# Altium PCB IM_v1.1.PcbDoc (part 1 of 4)
Units mm, origin at the board's own origin, x right, y up, seen from the top; angles counter-clockwise.
Board outline 120 x 85 mm, 4 copper layers (Top Layer, S2, S3, Bottom Layer), stack 1.516 mm thick; 285 components, 245 nets, 1048 pads, 482 vias.
Unrouted connection lines stored in the file: 53.
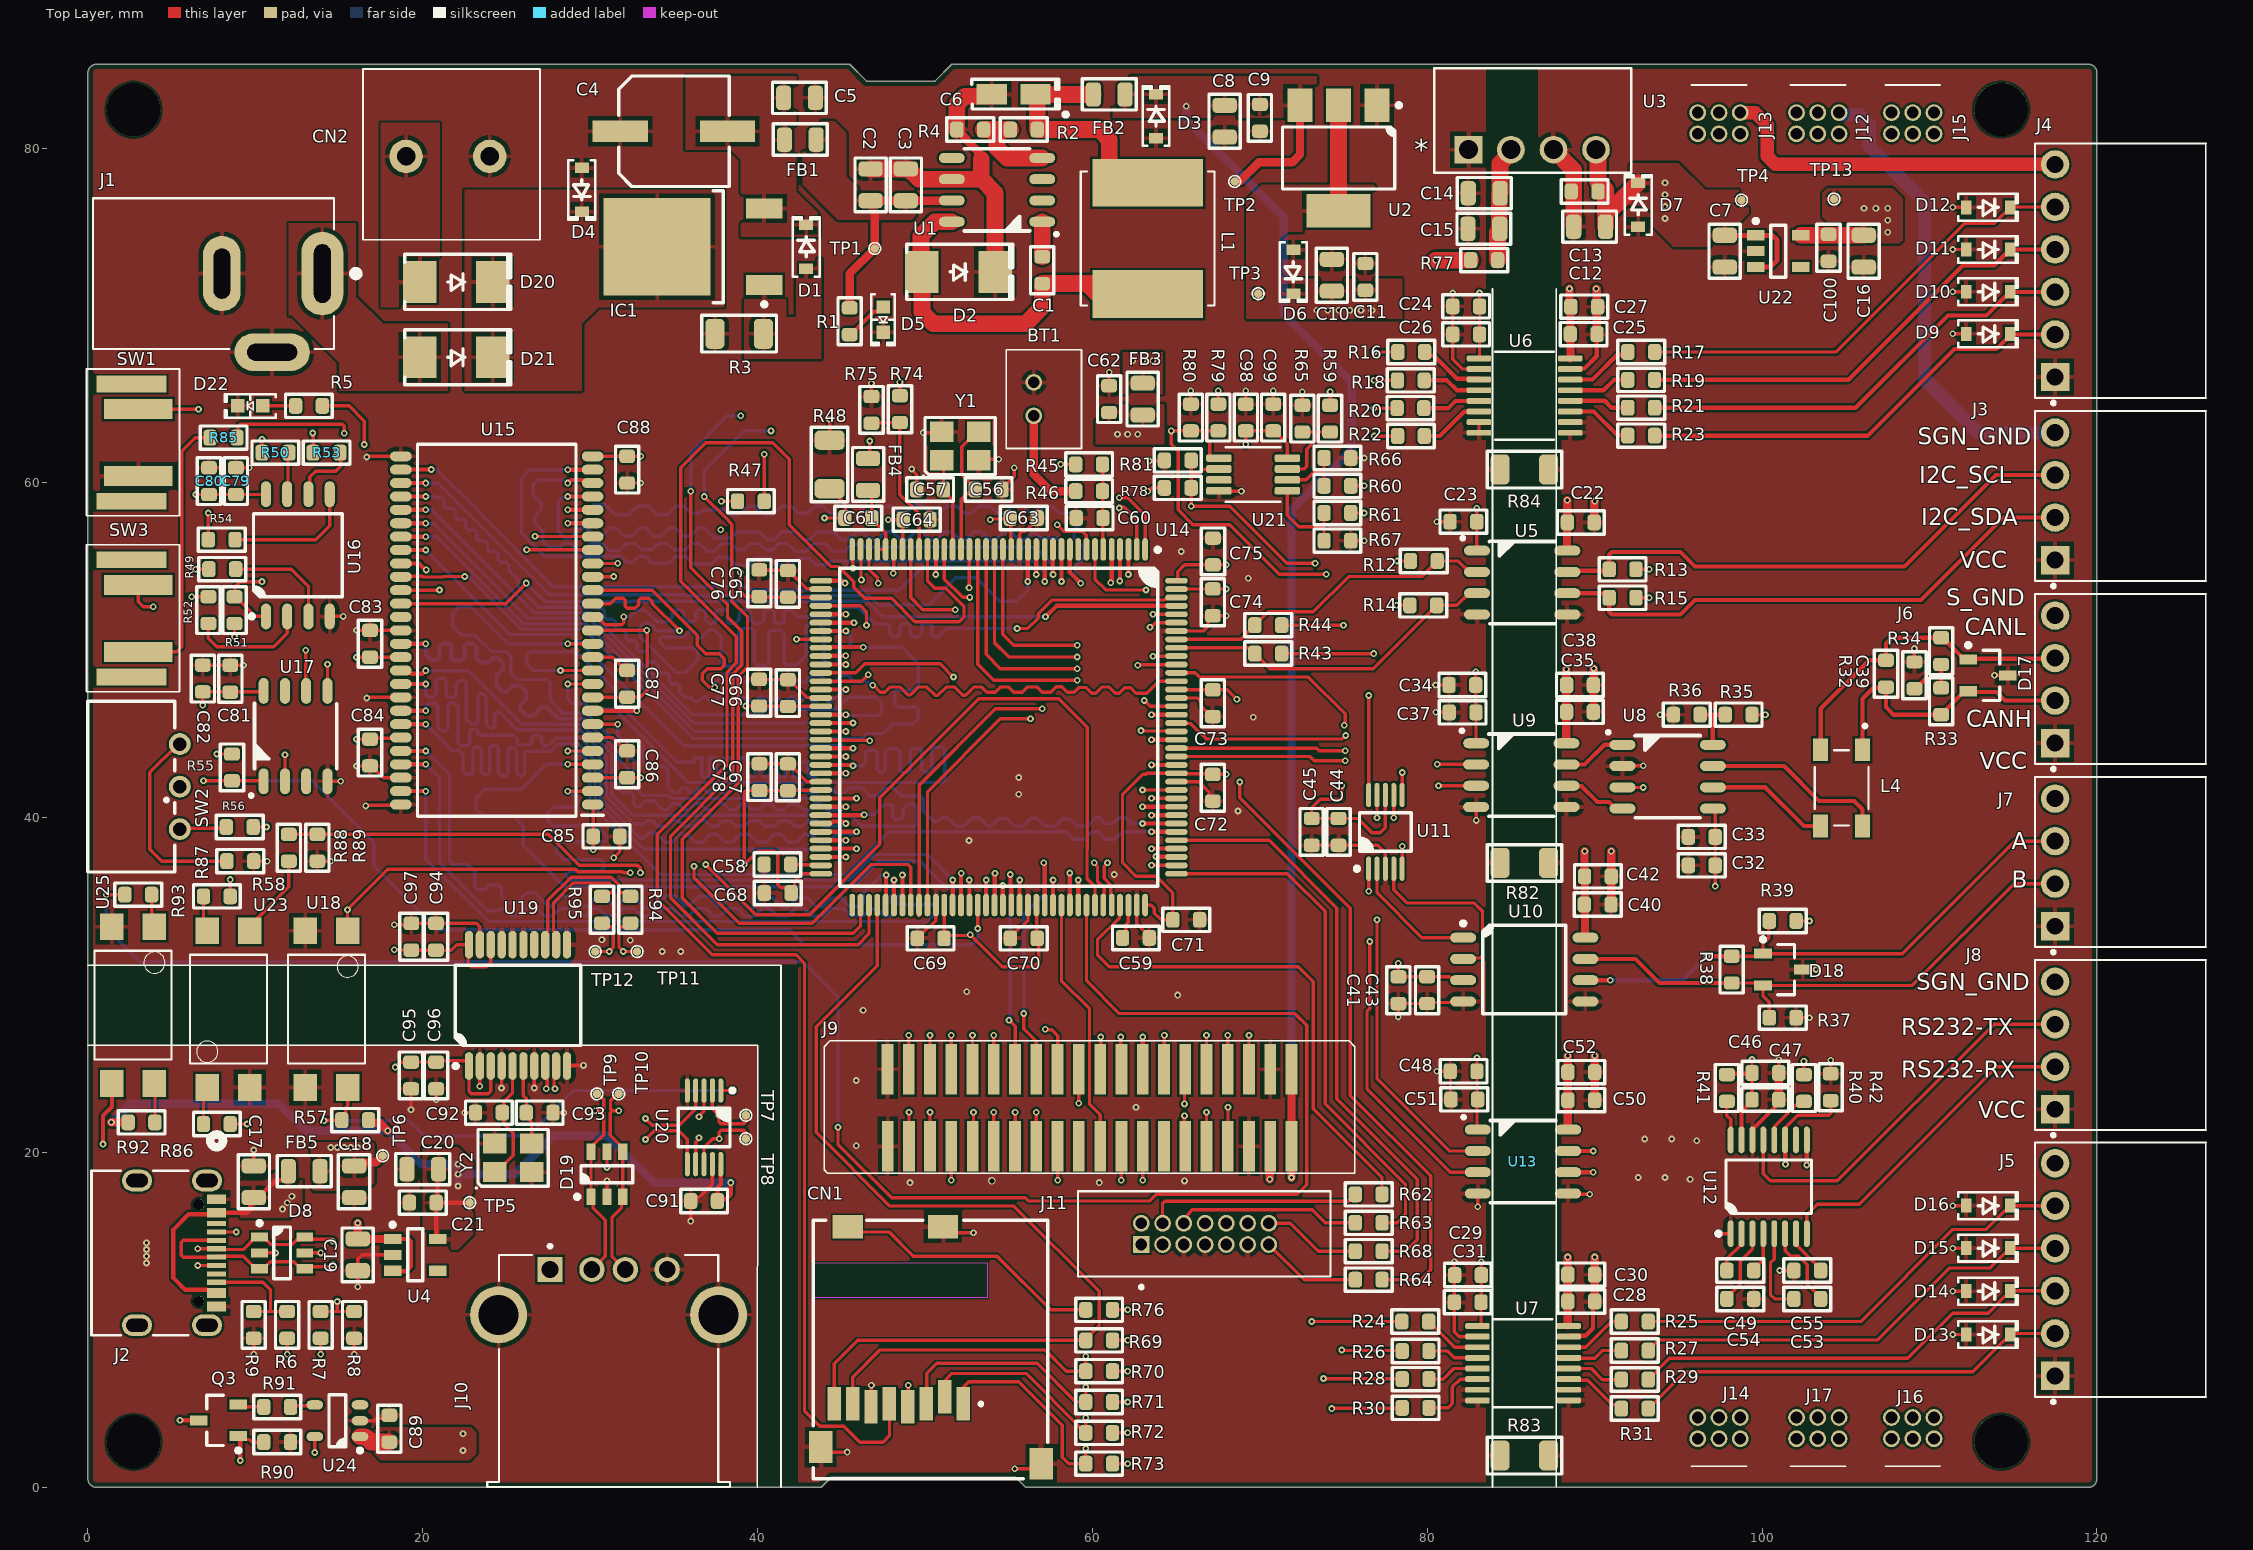
[diagram p0: Top Layer view]
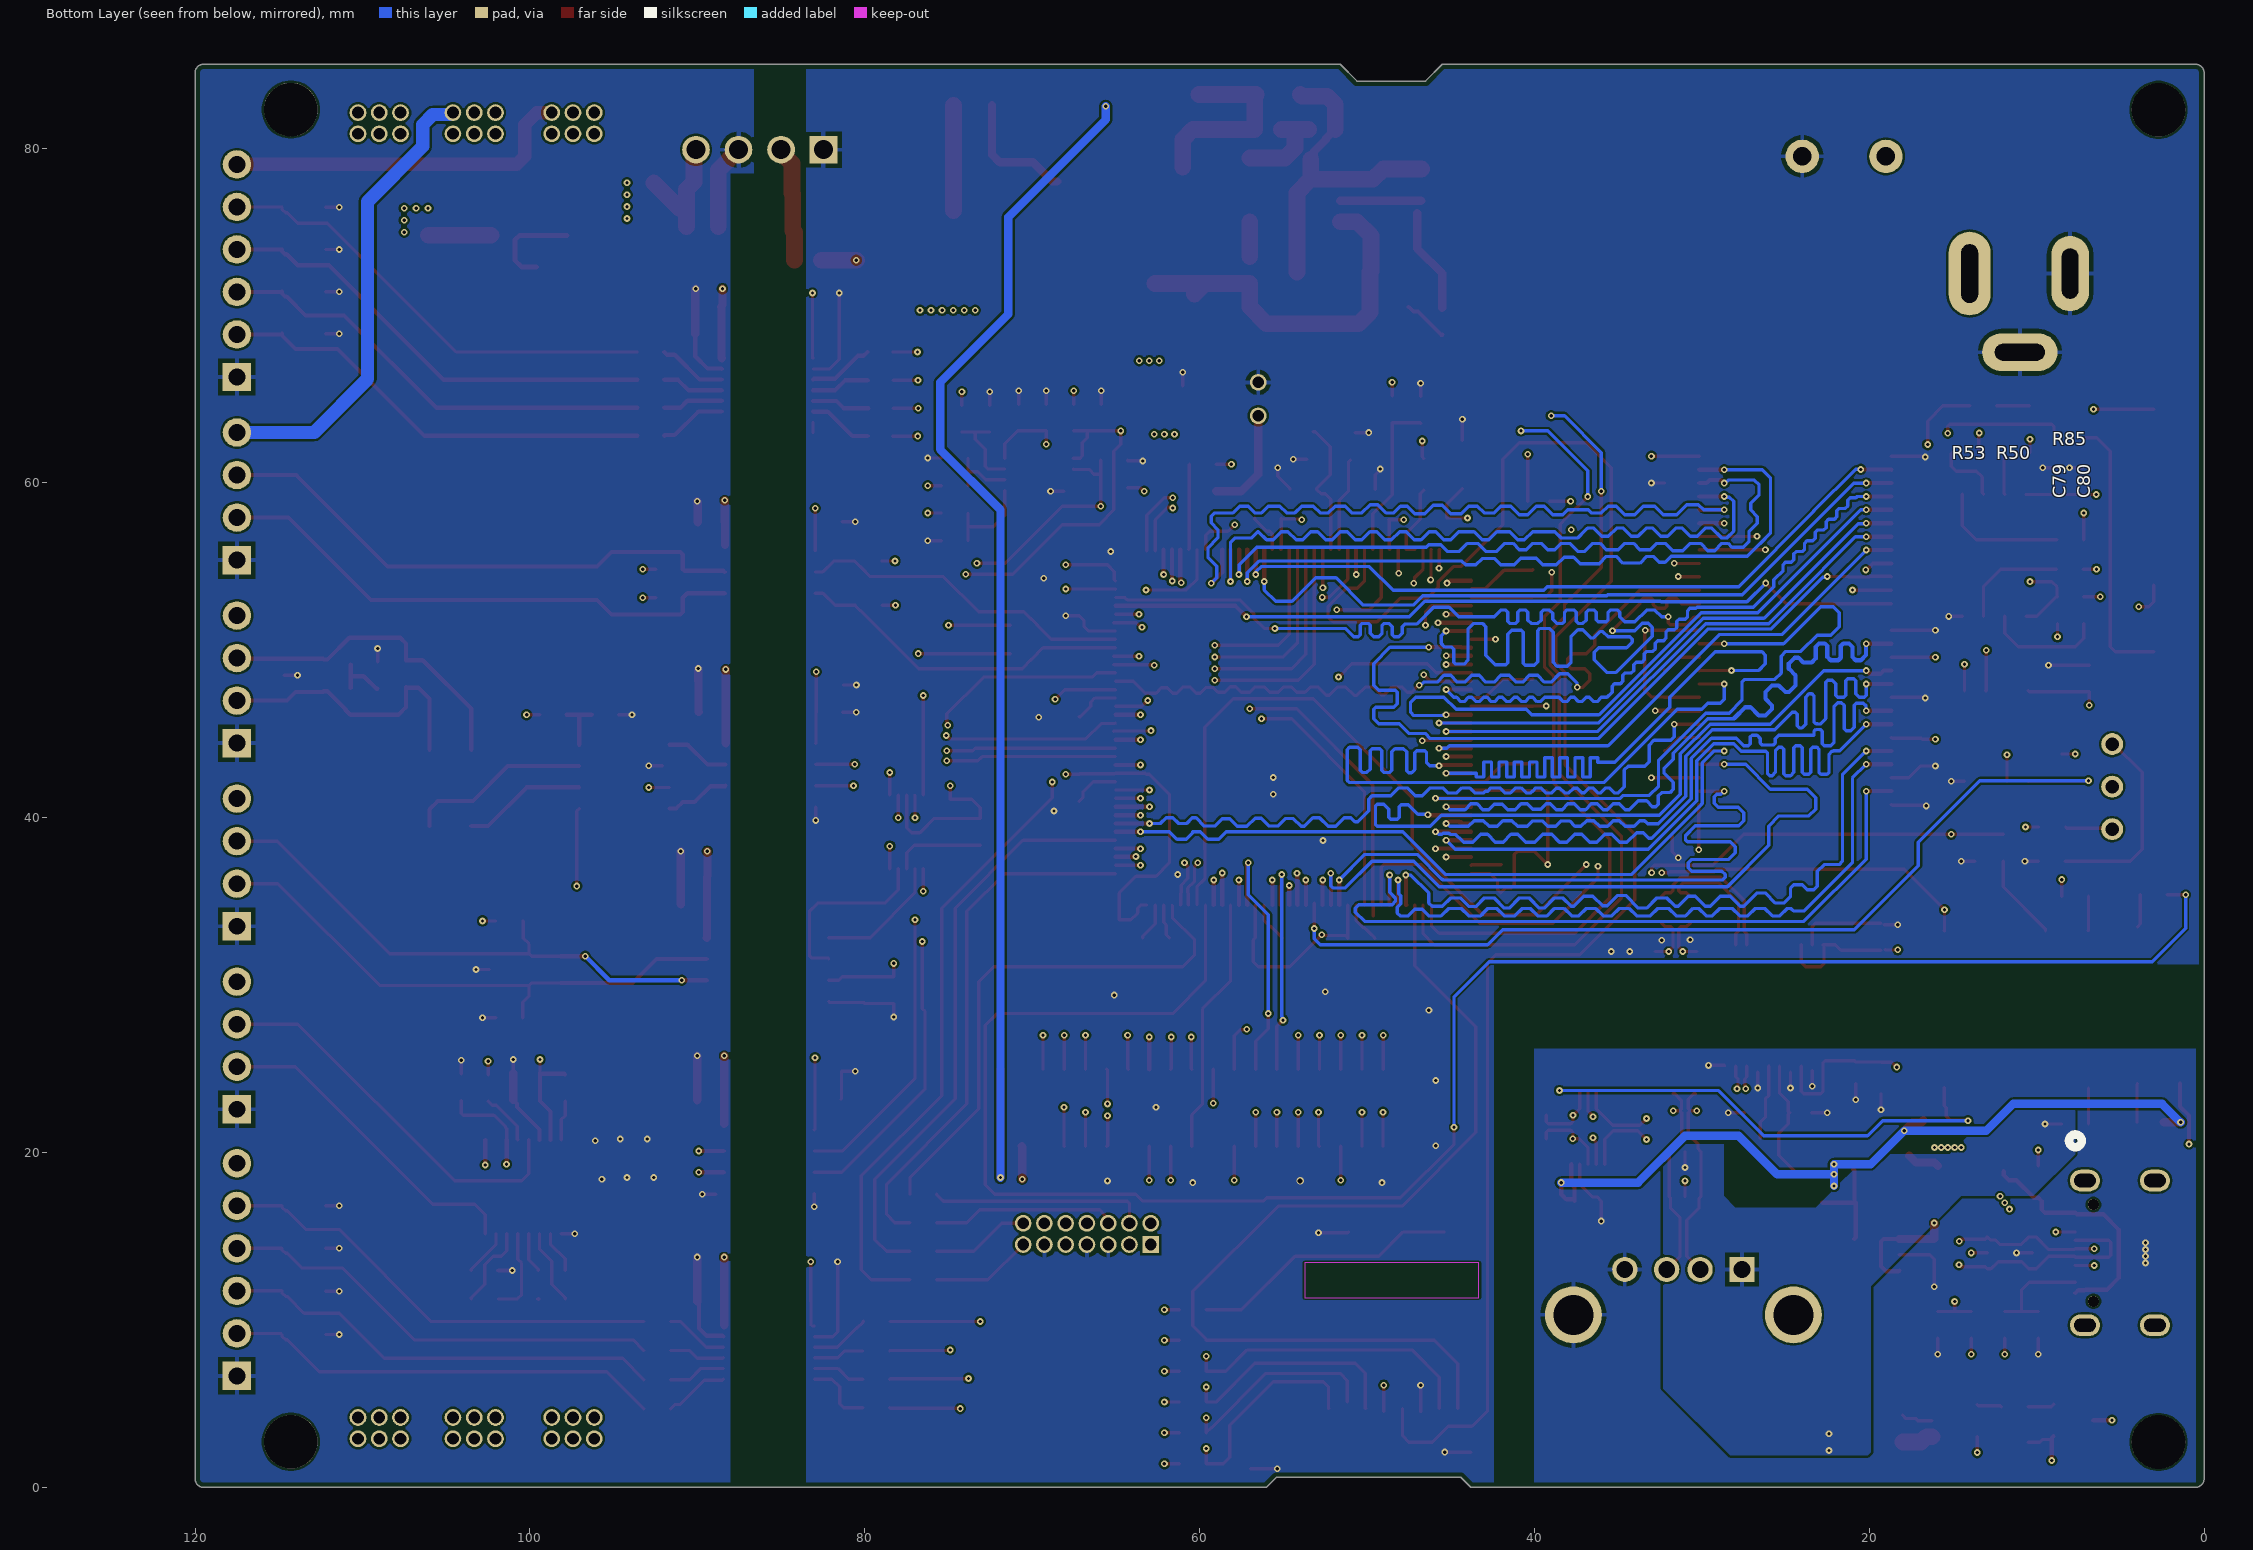
[diagram p1: Bottom Layer view, seen from below]
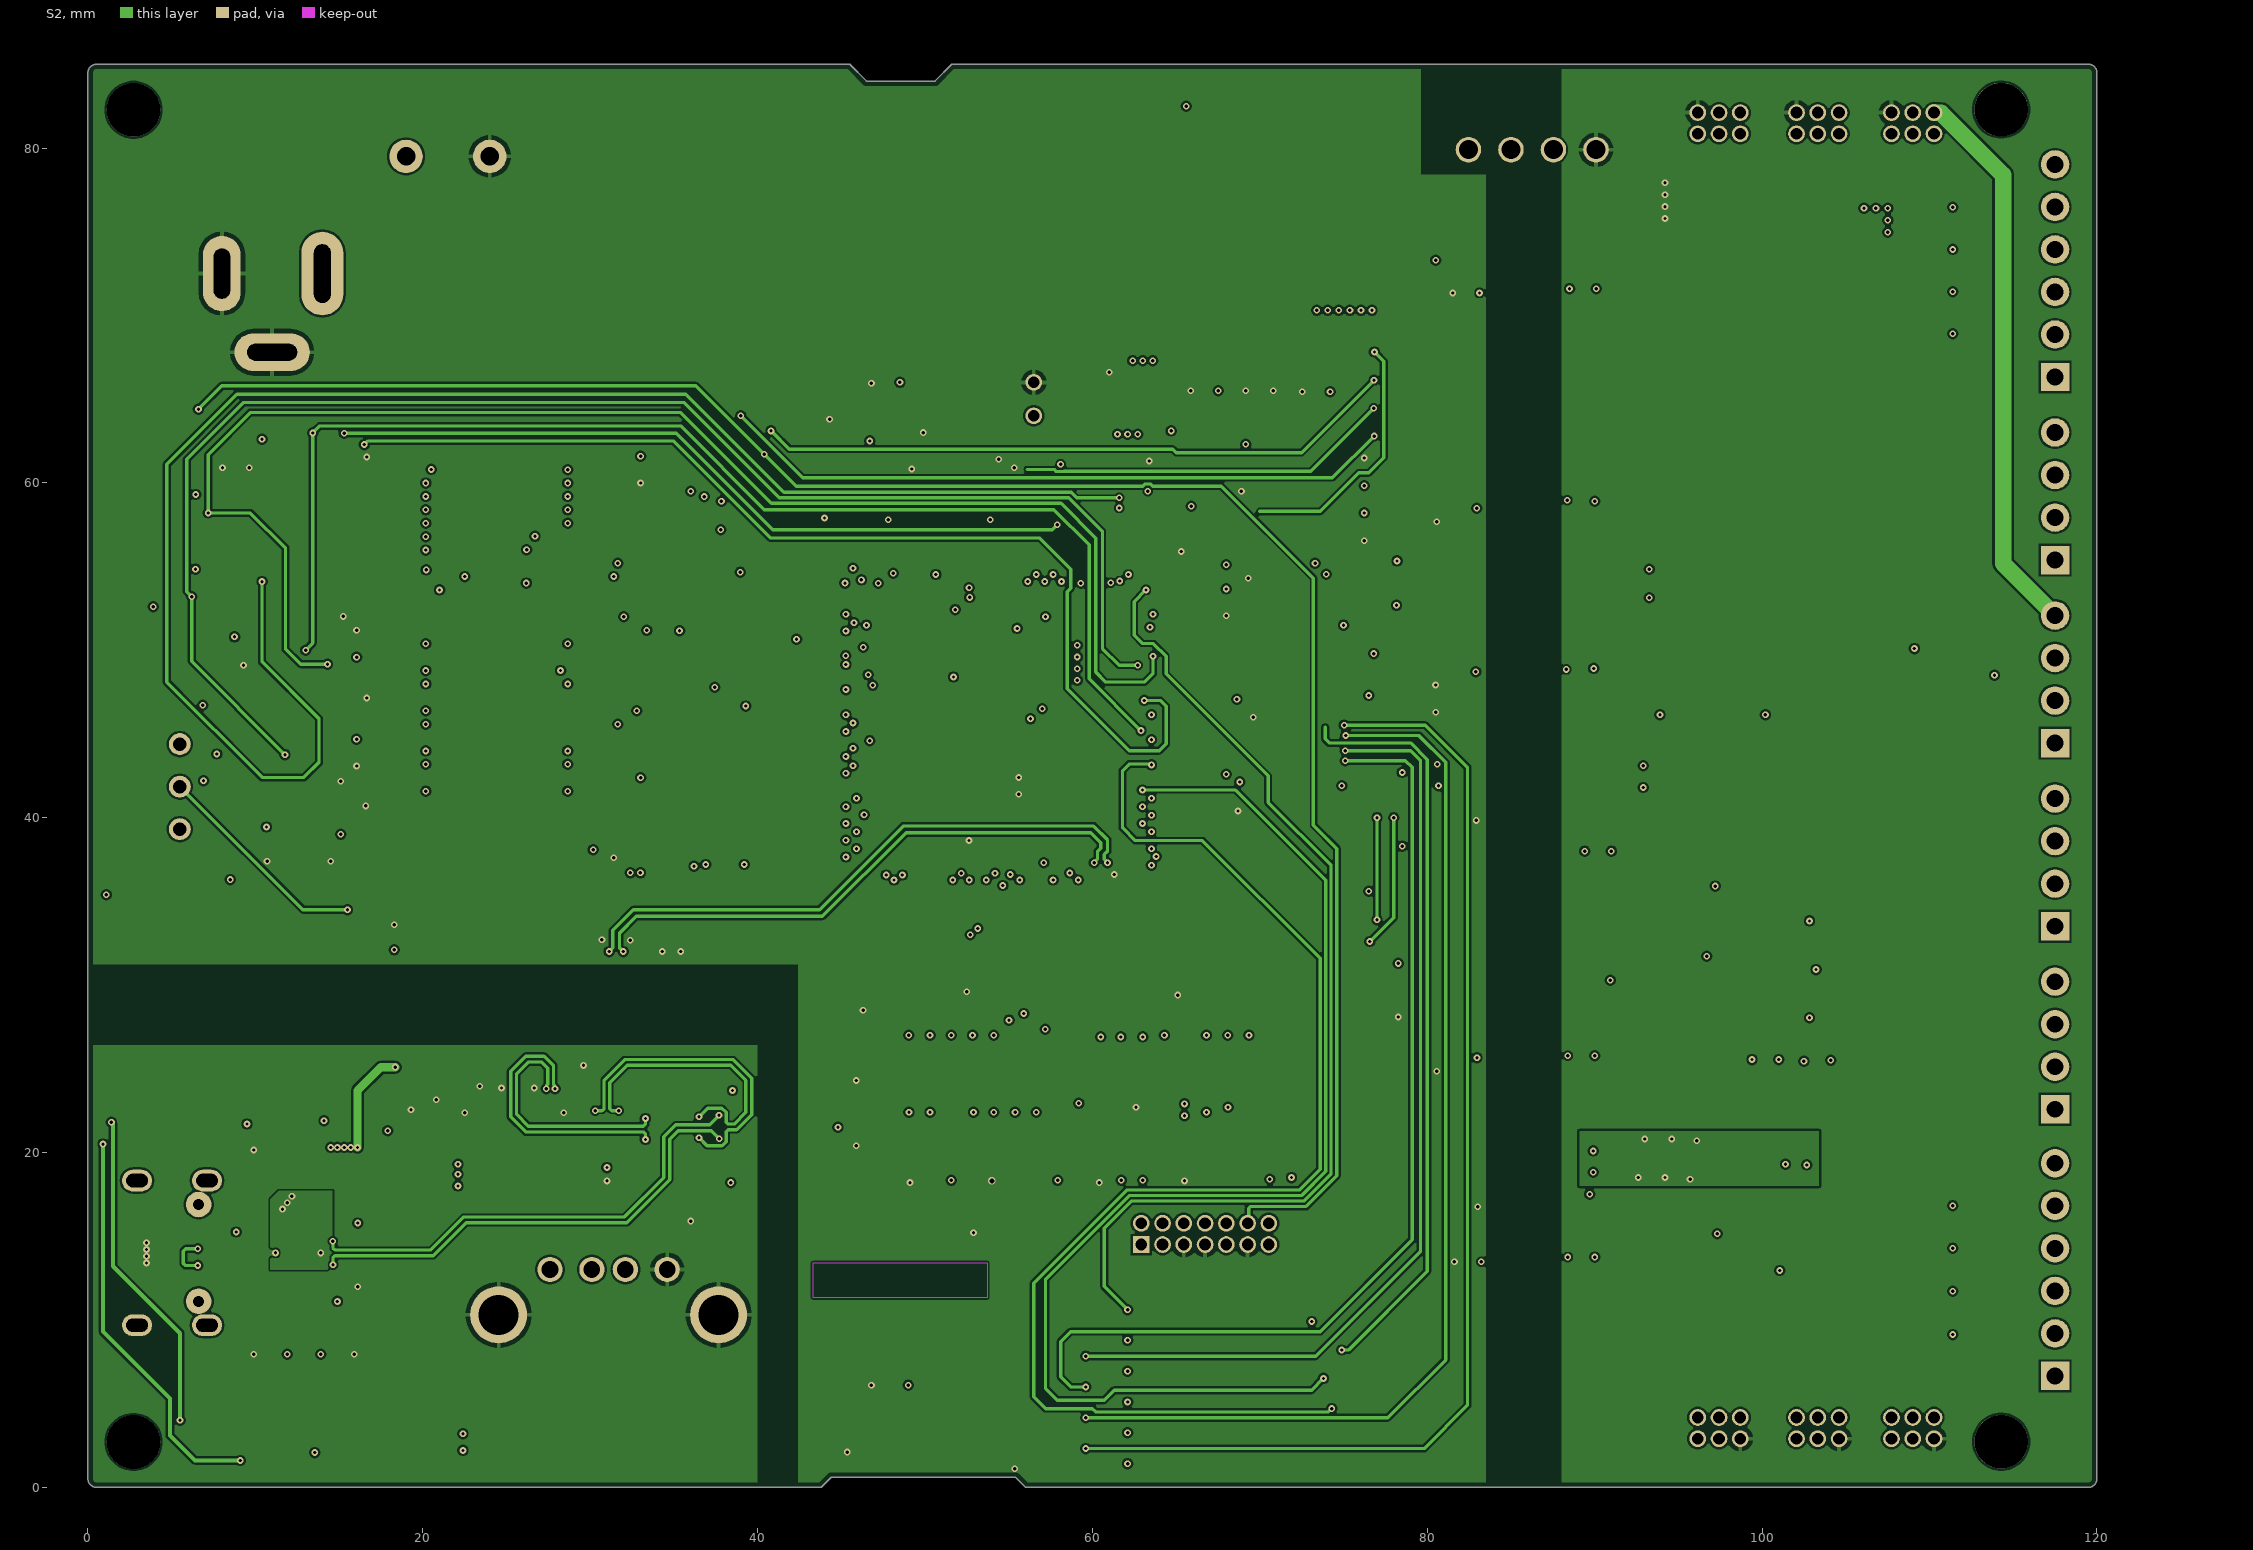
[diagram p2: S2]
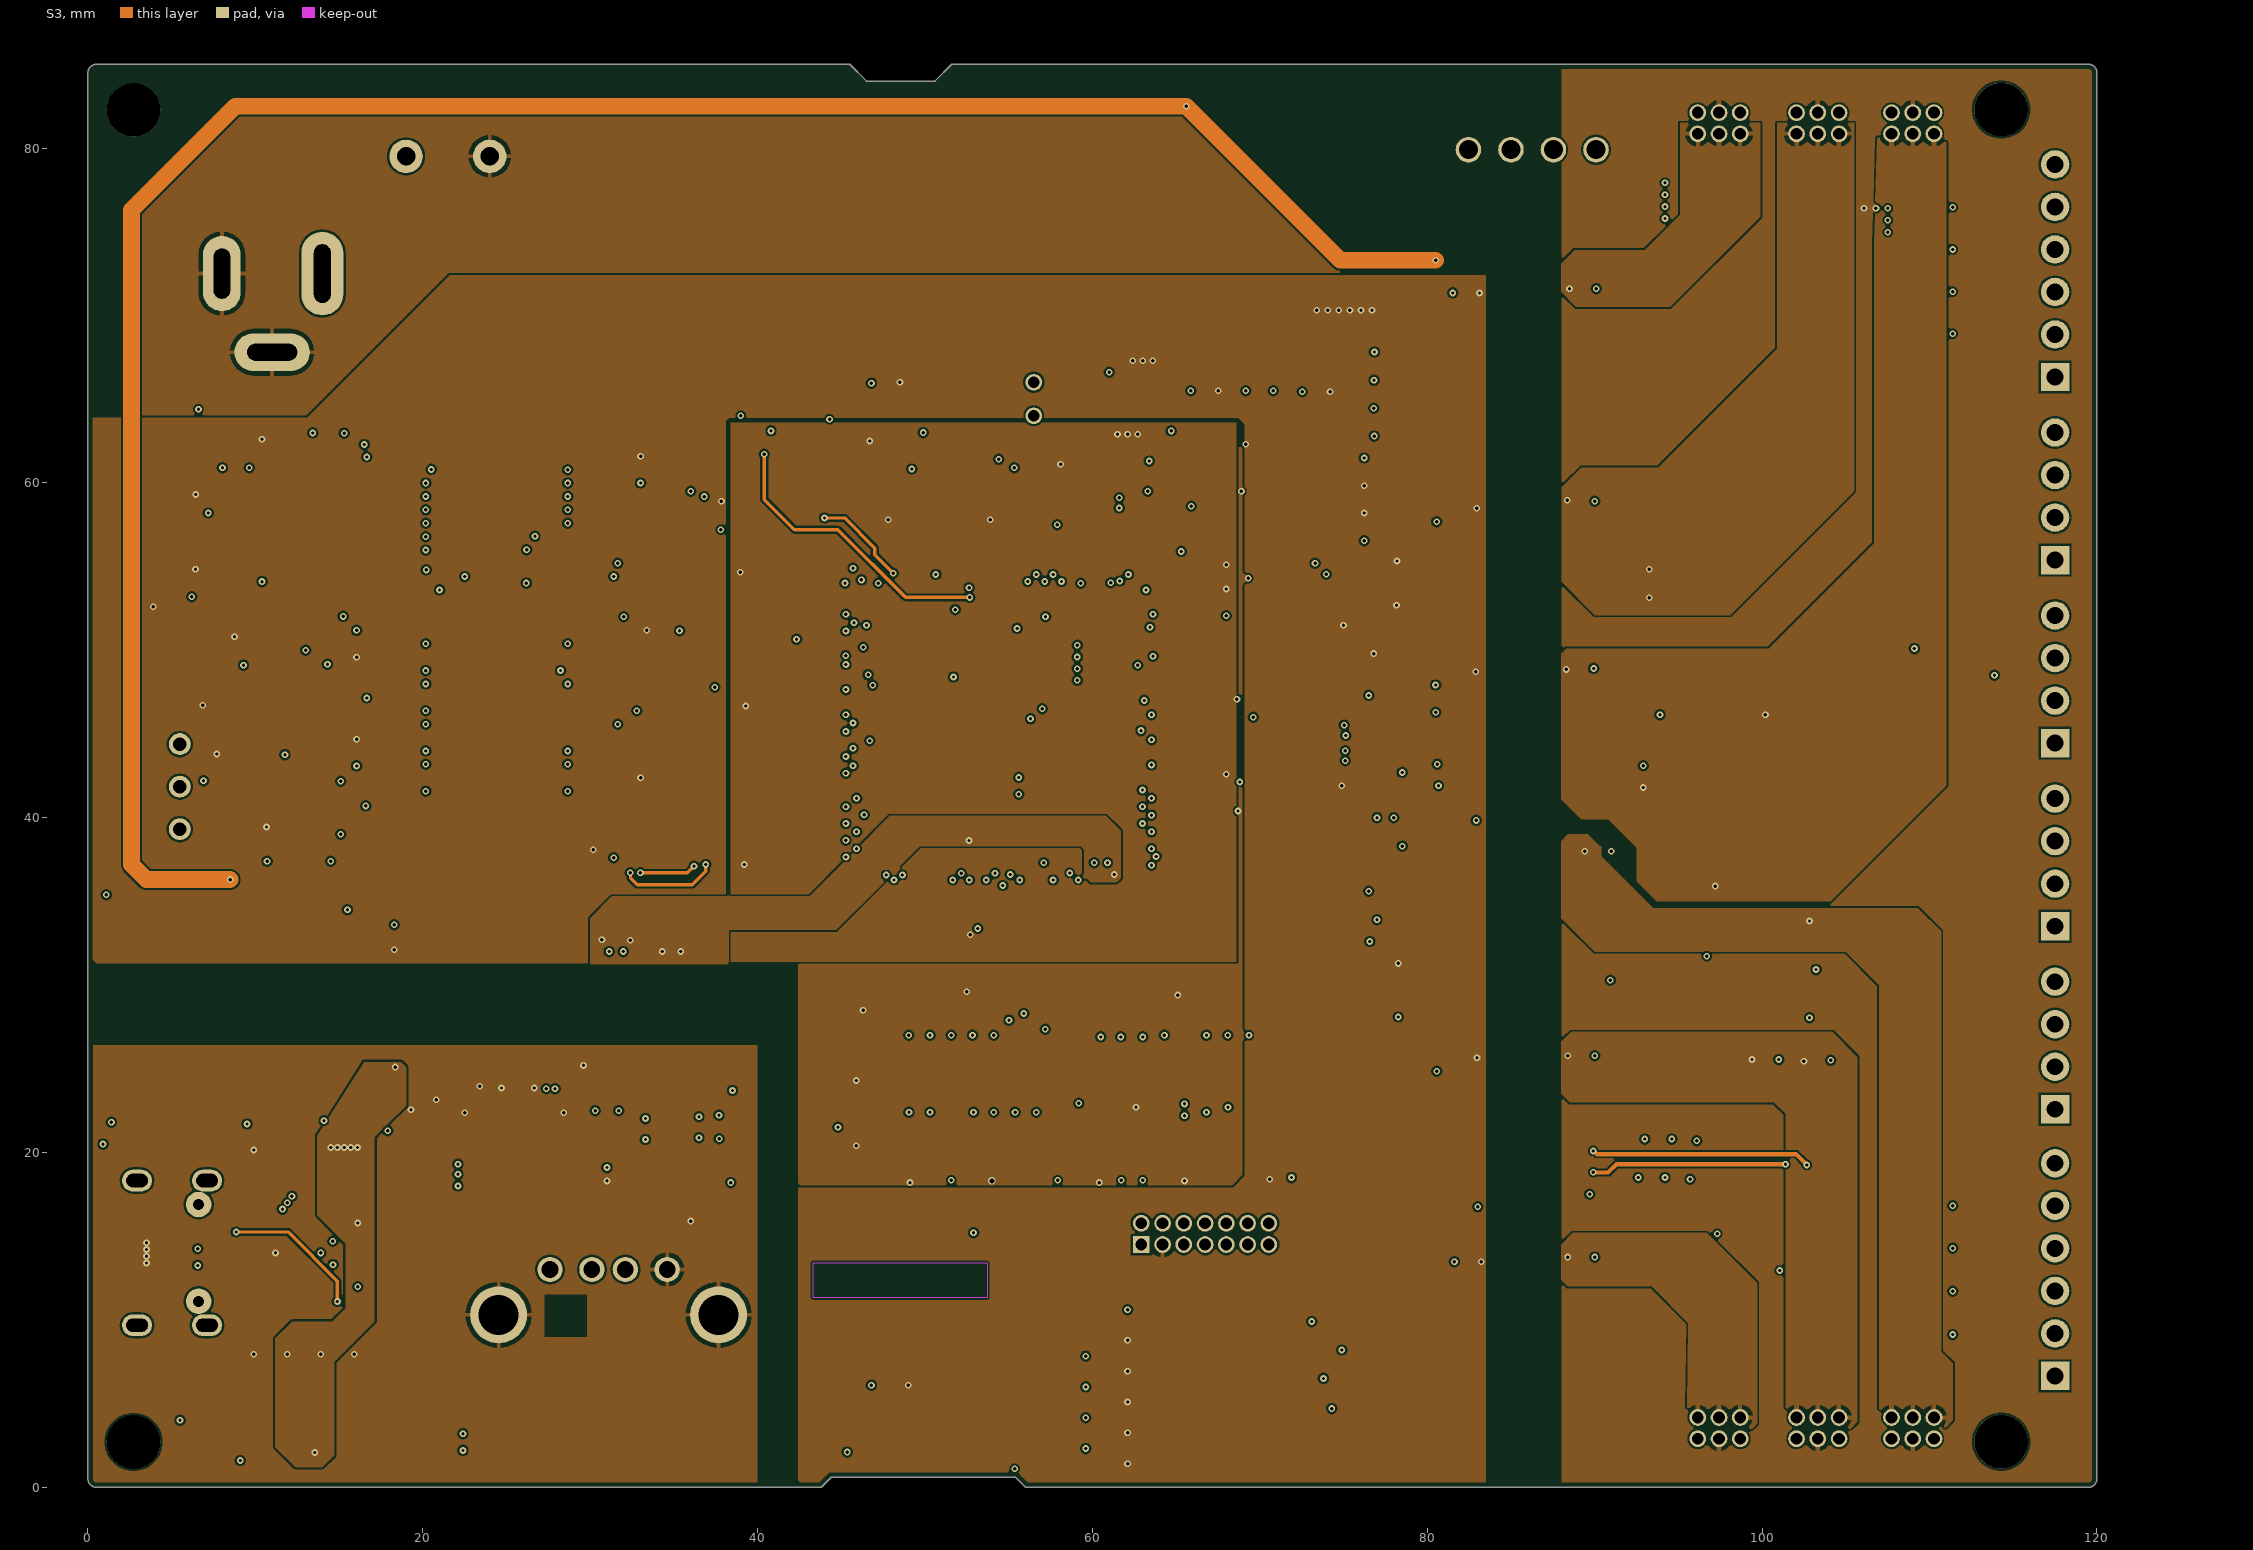
[diagram p3: S3]
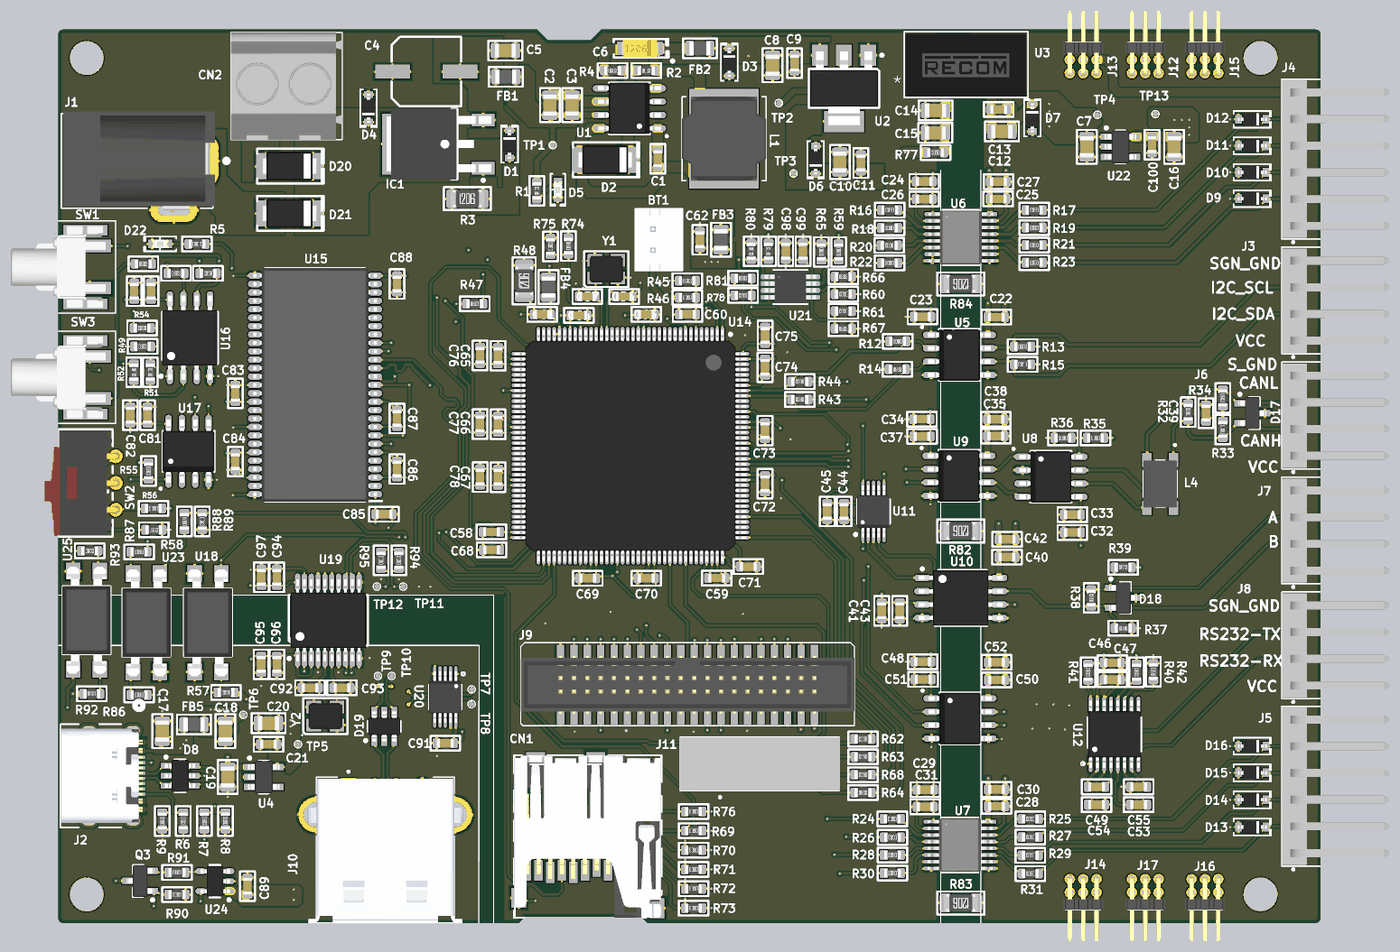
[diagram p6: 3D render of the assembled board from above, using the file's embedded part models]

## Layer stack, top to bottom
Top Solder: solder mask 0.0102, Solder Resist, Dk 3.5
Top Layer: signal copper 0.035
Dielectric 2: prepreg 0.0994, PP-006, Dk 4.1
Dielectric 4: prepreg 0.55, PP-006, Dk 4.1
S2: signal copper 0.0152
Dielectric 1: dielectric 0.1164, FR-4, Dk 4.8
S3: signal copper 0.0152
Dielectric 5: prepreg 0.55, PP-006, Dk 4.1
Dielectric 3: prepreg 0.0994, PP-006, Dk 4.1
Bottom Layer: signal copper 0.035
Bottom Solder: solder mask 0.0102, Solder Resist, Dk 3.5

## Board outline
0.5,0 43.8,0 44.4,0.6 55.4,0.6 56,0 119.5,0 ccw(c119.5,0.5) 120,0.5 120,84.5 ccw(c119.5,84.5) 119.5,85 51.6,85 50.6,84 46.5,84 45.5,85 0.5,85 ccw(c0.5,84.5) 0,84.5 0,0.5 ccw(c0.5,0.5)

## Design rules (kind name [scope] priority, off if disabled: settings)
BoardOutlineClearance BoardOutlineClearance_1 [OnLayer('Top Overlay')] p1: gap=0.3 ignorepadtopadclearanceinfootprint=FALSE except(0: Track-OutlineEdge Track-CavityEdge Track-CutoutEdge Track-SplitBarrior Track-SplitContinuation; 0.05: Text-OutlineEdge Text-CavityEdge Text-CutoutEdge Text-SplitBarrior Text-SplitContinuation; 0.1: SMDPad-OutlineEdge SMDPad-CavityEdge SMDPad-CutoutEdge SMDPad-SplitBarrior SMDPad-SplitContinuation)
BoardOutlineClearance [All] p2: gap=0.3 ignorepadtopadclearanceinfootprint=FALSE except(0.05: Text-OutlineEdge Text-CavityEdge Text-CutoutEdge Text-SplitBarrior Text-SplitContinuation)
Clearance [All] p1: gap=0.127 ignorepadtopadclearanceinfootprint=TRUE
DiffPairsRouting [All] p1: maxlimit=0.254 minlimit=0.127 mostfreqgap=0.149 toplayer_minwidth=0.149 toplayer_maxwidth=0.381 toplayer_prefwidth=0.2 midlayer2_minwidth=0.149 midlayer2_maxwidth=0.381 midlayer2_prefwidth=0.2 midlayer3_minwidth=0.149 midlayer3_maxwidth=0.381 midlayer3_prefwidth=0.2 bottomlayer_minwidth=0.149 bottomlayer_maxwidth=0.381 bottomlayer_prefwidth=0.2 maxuncoupledlength=12.7
HoleSize [All] p1: absolutevalues=TRUE maxlimit=5 minlimit=0.025 maxpercent=80.000 minpercent=20.000
HoleToHoleClearance [All] p1: gap=0.2 allowstackedmicrovias=TRUE
Length [InNetClass('FMC_A[0..12]')] p1: maxlimit=57.5 minlimit=0
Length B[0..7] [InNetClass('LTDC_B[0..7]')] p2: maxlimit=53.677 minlimit=14.35
Length G[0..7] [InNetClass('LTDC_G[0..7]')] p3: maxlimit=53.677 minlimit=14.35
Length R[0..7] [InNetClass('LTDC_R[0..7]')] p4: maxlimit=53.677 minlimit=14.35
PolygonConnect [All] p1: connectstyle=Relief reliefconductorwidth=0.254 reliefentries=4 polygonreliefangle="90 Angle" airgapwidth=0.254
RoutingVias [All] p1: holewidth=0.2 width=0.4 viastyle="Through Hole" minholewidth=0.2 minwidth=0.4 maxholewidth=0.8 maxwidth=1
SilkToSilkClearance [All] p1: silktosilkclearance=0.05
SilkToSolderMaskClearance [IsPad] p1: minsilkscreentomaskgap=0 clearancetoexposedcopper=TRUE
SolderMaskExpansion [All] p1: expansion=0.102 istentingtop=FALSE
SupplyNets "Schematic Supply Nets_30" [InNet('EXT_U6_VCC')] p1: voltage=0.000
SupplyNets "Schematic Supply Nets_14" [InNet('U9_VCC')] p2: voltage=0.000
SupplyNets "Schematic Supply Nets_13" [InNet('EXT_U7_VCC')] p3: voltage=0.000
SupplyNets "Schematic Supply Nets_12" [InNet('EXT_U9_VCC')] p4: voltage=0.000
SupplyNets "Schematic Supply Nets_11" [InNet('U10_VCC')] p5: voltage=0.000
SupplyNets "Schematic Supply Nets_10" [InNet('U7_VCC')] p6: voltage=0.000
SupplyNets "Schematic Supply Nets_9" [InNet('U13_VCC')] p7: voltage=0.000
SupplyNets "Schematic Supply Nets_8" [InNet('EXT_U10_VCC')] p8: voltage=0.000
SupplyNets "Schematic Supply Nets_7" [InNet('U6_VCC')] p9: voltage=0.000
SupplyNets "Schematic Supply Nets_6" [InNet('EXT_U13_VCC')] p10: voltage=0.000
SupplyNets "Schematic Supply Nets_5" [InNet('U5_VCC')] p11: voltage=0.000
SupplyNets "Schematic Supply Nets_4" [InNet('EXT_U5_VCC')] p12: voltage=0.000
SupplyNets "Schematic Supply Nets_3" [InNet('+12V_K')] p13: voltage=0.000
SupplyNets "Schematic Supply Nets_2" [InNet('+12V_J')] p14: voltage=0.000
SupplyNets "Schematic Supply Nets_1" [InNet('+3.3V_ISO')] p15: voltage=0.000
SupplyNets "Schematic Supply Nets_29" [InNet('AVDD')] p16: voltage=0.000
SupplyNets "Schematic Supply Nets_28" [InNet('GND_IN')] p17: voltage=0.000
SupplyNets "Schematic Supply Nets_27" [InNet('VDD')] p18: voltage=0.000
SupplyNets "Schematic Supply Nets_26" [InNet('VBUS')] p19: voltage=0.000
SupplyNets "Schematic Supply Nets_25" [InNet('+5VISO')] p20: voltage=0.000
SupplyNets "Schematic Supply Nets_24" [InNet('AGND')] p21: voltage=0.000
SupplyNets "Schematic Supply Nets_23" [InNet('+12VIN')] p22: voltage=0.000
SupplyNets "Schematic Supply Nets_22" [InNet('+3.3VUSB_FILT')] p23: voltage=0.000
SupplyNets "Schematic Supply Nets_21" [InNet('+3.3VDC')] p24: voltage=0.000
SupplyNets "Schematic Supply Nets_20" [InNet('+5VDC')] p25: voltage=0.000
SupplyNets "Schematic Supply Nets_19" [InNet('USB_GND')] p26: voltage=0.000
SupplyNets "Schematic Supply Nets_18" [InNet('+VUSB')] p27: voltage=0.000
SupplyNets "Schematic Supply Nets_17" [InNet('+5VUSB_FILT')] p28: voltage=0.000
SupplyNets "Schematic Supply Nets_16" [InNet('+12VDC')] p29: voltage=0.000
SupplyNets "Schematic Supply Nets_15" [InNet('SGN_GND')] p30: voltage=0.000
Width [All] p1: maxlimit=1 minlimit=0.127 preferedwidth=0.2
25 further rules are at their usual default settings.

## Classes and differential pairs
net class FMC_CNT: FMC_BA0 FMC_BA1 FMC_NBL0 FMC_NBL1 FMC_SDCKE0 FMC_SDCLK FMC_SDNCAS FMC_SDNE0 FMC_SDNRAS FMC_SDNWE
component class Main: R82 R83 R84
net class LTDC_R[0..7]: LTDC_R0 LTDC_R1 LTDC_R2 LTDC_R3 LTDC_R4 LTDC_R5 LTDC_R6 LTDC_R7
net class LTDC_G[0..7]: LTDC_G0 LTDC_G1 LTDC_G2 LTDC_G3 LTDC_G4 LTDC_G5 LTDC_G6 LTDC_G7
net class LTDC_B[0..7]: LTDC_B0 LTDC_B1 LTDC_B2 LTDC_B3 LTDC_B4 LTDC_B5 LTDC_B6 LTDC_B7
net class FMC_D[0..15]: FMC_D0 FMC_D1 FMC_D2 FMC_D3 FMC_D4 FMC_D5 FMC_D6 FMC_D7 FMC_D8 FMC_D9 FMC_D10 FMC_D11 FMC_D12 FMC_D13 FMC_D14 FMC_D15
net class FMC_A[0..12]: FMC_A0 FMC_A1 FMC_A2 FMC_A3 FMC_A4 FMC_A5 FMC_A6 FMC_A7 FMC_A8 FMC_A9 FMC_A10 FMC_A11 FMC_A12
component class U_USB_Isolation: C89 C91 C92 C93 C94 C95 C96 C97 D19 J10 Q3 R56 R57 R58 R86 R87 R88 R89 R90 R91 R92 R93 R94 R95 SW2 TP9 TP10 TP11 TP12 U18 U19 U20 U23 U24 U25 Y2
component class U_System_Power: C1 C2 C3 C4 C5 C6 C7 C8 C9 C10 C11 C12 C13 C14 C15 C16 C17 C18 C19 C20 C21 C100 CN2 D1 D2 D3 D4 D5 D6 D7 D8 D20 D21 FB1 FB2 FB5 IC1 J1 J2 L1 R1 R2 R3 R4 R6 R7 R8 R9 R77 TP1 TP2 TP3 TP4 TP5 TP6 TP7 TP8 TP13 U1 U2 U3 U4 U22
component class U_Peripherals: C98 C99 CN1 J11 R59 R60 R61 R62 R63 R64 R65 R66 R67 R68 R69 R70 R71 R72 R73 R74 R75 R76 R78 R79 R80 R81 U21
component class U_Memory: C79 C80 C81 C82 C83 C84 C85 C86 C87 C88 R49 R50 R51 R52 R53 R54 R55 U15 U16 U17
component class U_MCU: BT1 C56 C57 C58 C59 C60 C61 C62 C63 C64 C65 C66 C67 C68 C69 C70 C71 C72 C73 C74 C75 C76 C77 C78 D22 FB3 FB4 R5 R43 R44 R45 R46 R47 R48 R85 SW1 SW3 U14 Y1
component class U_LCD: J9
component class U_Interfaces_Isolation: C22 C23 C24 C25 C26 C27 C28 C29 C30 C31 C32 C33 C34 C35 C37 C38 C39 C40 C41 C42 C43 C44 C45 C46 C47 C48 C49 C50 C51 C52 C53 C54 C55 D9 D10 D11 D12 D13 D14 D15 D16 D17 D18 J3 J4 J5 J6 J7 J8 J12 J13 J14 J15 J16 J17 L4 R12 R13 R14 R15 R16 R17 R18 R19 R20 R21 R22 R23 R24 R25 R26 R27 R28 R29 R30 R31 R32 R33 R34 R35 R36 R37 R38 R39 R40 R41 R42 U5 U6 U7 U8 U9 U10 U11 U12 U13
differential pair USB_FS: +USB_FS_P -USB_FS_N
differential pair DD: +DD_P -DD_N
differential pair USB_D: +USB_D_P -USB_D_N
differential pair USB_D2: +USB_D2_P -USB_D2_N
differential pair USB_D1: +USB_D1_P -USB_D1_N

## Components (designator, comment, footprint, x,y, rotation, side; value= is the part's Value field where it differs from the comment)
BT1 "DS1066-2MVW6X" BATT_CONN 56.5,65 r90 top
C1 "10nF/0603/50V" 0603_CAP 57,72.7 r90 top
C2 "4u7F/0805/35V" 0805_CAP 46.75,77.8 r270 top
C3 "4u7F/0805/35V" 0805_CAP 48.85,77.8 r270 top
C4 "100uF/ALM/35V" "CAP ALSMD 6.6MM" 35,81 r0 top
C5 "10uF/0805/35V" 0805_CAP 42.5,83 r180 top
C6 "100uF/1206/TANT" "CAP POL 1206_3216" 55.3,83.2 r180 top
C7 "1uF/0805/35V" 0805_CAP 97.773,73.837 r90 top
C8 "10uF/0805/35V" 0805_CAP 67.9,81.6 r90 top
C9 "100nF/0603/50V" 0603_CAP 70,81.8 r90 top
C10 "10uF/0805/35V" 0805_CAP 74.3,72.4 r270 top
C11 "100nF/0603/50V" 0603_CAP 76.3,72.3 r270 top
C12 "10uF/0805/35V" 0805_CAP 89.7,75.3 r0 top
C13 "100nF/0603/50V" 0603_CAP 89.4,77.4 r0 top
C14 "4u7F/0805/35V" 0805_CAP 83.4,77.3 r0 top
C15 "4u7F/0805/35V" 0805_CAP 83.381,75.173 r0 top
C16 "1uF/0805/35V" 0805_CAP 106.073,73.837 r90 top
C17 "2u2F/0805/16V" 0805_CAP 9.9,18.25 r270 top
C18 "2u2F/0805/16V" 0805_CAP 15.9,18.25 r90 top
C19 "1uF/0805/35V" 0805_CAP 16.117,13.884 r90 top
C20 "1uF/0805/35V" 0805_CAP 20,19 r0 top
C21 "100nF/0603/50V" 0603_CAP 20,17 r0 top
C22 "100nF/0603/50V" 0603_CAP 89.169,57.634 r180 top
C23 "100nF/0603/50V" 0603_CAP 82.161,57.676 r0 top
C24 "1uF/0603/16V" 0603_CAP 82.322,70.542 r0 top
C25 "?F/0603/?V/" 0603_CAP 89.341,68.881 r180 top
C26 "100nF/0603/50V" 0603_CAP 82.322,68.869 r180 top
C27 "1uF/0603/16V" 0603_CAP 89.378,70.518 r180 top
C28 "?F/0603/?V/" 0603_CAP 89.2,11.1 r180 top
C29 "1uF/0603/16V" 0603_CAP 82.432,12.677 r0 top
C30 "1uF/0603/16V" 0603_CAP 89.2,12.7 r180 top
C31 "100nF/0603/50V" 0603_CAP 82.413,11.054 r180 top
C32 "1uF/0603/16V" 0603_CAP 96.4,37.15 r0 top
C33 "100nF/0603/50V" 0603_CAP 96.4,38.85 r180 top
C34 "1uF/0603/16V" 0603_CAP 82.098,47.923 r0 top
C35 "?F/0603/?V/" 0603_CAP 89.121,46.32 r180 top
C37 "100nF/0603/50V" 0603_CAP 82.109,46.287 r180 top
C38 "1uF/0603/16V" 0603_CAP 89.121,47.92 r180 top
C39 "1uF/0603/16V" 0603_CAP 109.1,48.5 r270 top
C40 "?F/0603/?V/" 0603_CAP 90.179,34.808 r180 top
C41 "1uF/0603/16V" 0603_CAP 78.273,29.692 r90 top
C42 "1uF/0603/16V" 0603_CAP 90.195,36.495 r180 top
C43 "100nF/0603/50V" 0603_CAP 79.995,29.695 r270 top
C44 "1uF/0603/16V" 0603_CAP 74.7,39.15 r90 top
C45 "100nF/0603/50V" 0603_CAP 73.1,39.15 r270 top
C46 "1uF/0603/16V" 0603_CAP 100.2,24.75 r180 top
C47 "?F/0603/?V/" 0603_CAP 100.2,23.15 r180 top
C48 "1uF/0603/16V" 0603_CAP 82.169,24.851 r0 top
C49 "100nF/0603/16V" 0603_CAP 98.7,12.95 r0 top
C50 "?F/0603/?V/" 0603_CAP 89.2,23.121 r180 top
C51 "100nF/0603/50V" 0603_CAP 82.215,23.17 r180 top
C52 "1uF/0603/16V" 0603_CAP 89.2,24.799 r180 top
C53 "330nF/0603/16V" 0603_CAP 102.7,11.25 r0 top
C54 "330nF/0603/16V" 0603_CAP 98.7,11.25 r0 top
C55 "330nF/0603/16V" 0603_CAP 102.7,12.95 r180 top
C56 "?F/0603/?V/" 0603_CAP 53.8,59.6 r0 top
C57 "?F/0603/?V/" 0603_CAP 50.3,59.6 r180 top
C58 "2u2F/0603/16V" 0603_CAP 41.184,37.204 r180 top
C59 "2u2F/0603/16V" 0603_CAP 62.599,32.815 r0 top
C60 "100nF/0603/50V" 0603_CAP 59.83,57.9 r180 top
C61 "100nF/0603/50V" 0603_CAP 46.011,57.9 r180 top
C62 "4u7F/0603/16V" 0603_CAP 61,65 r270 top
C63 "100nF/0603/50V" 0603_CAP 55.9,57.9 r0 top
C64 "100nF/0603/50V" 0603_CAP 49.5,57.8 r0 top
C65 "100nF/0603/50V" 0603_CAP 41.805,53.963 r90 top
C66 "100nF/0603/50V" 0603_CAP 41.805,47.44 r90 top
C67 "100nF/0603/50V" 0603_CAP 41.805,42.409 r90 top
C68 "100nF/0603/50V" 0603_CAP 41.2,35.5 r180 top
C69 "100nF/0603/50V" 0603_CAP 50.334,32.794 r180 top
C70 "100nF/0603/50V" 0603_CAP 55.9,32.794 r180 top
C71 "100nF/0603/50V" 0603_CAP 65.6,33.9 r0 top
C72 "100nF/0603/50V" 0603_CAP 67.19,41.784 r270 top
C73 "100nF/0603/50V" 0603_CAP 67.19,46.835 r270 top
C74 "100nF/0603/50V" 0603_CAP 67.19,52.861 r270 top
C75 "100nF/0603/50V" 0603_CAP 67.2,55.9 r90 top
C76 "100nF/0603/50V" 0603_CAP 40.1,54 r90 top
C77 "100nF/0603/50V" 0603_CAP 40.094,47.467 r90 top
C78 "100nF/0603/50V" 0603_CAP 40.111,42.421 r90 top
C79 "100nF/0603/50V" 0603_CAP 8.832,60.102 r90 top
C80 "1uF/0603/16V" 0603_CAP 7.232,60.102 r270 top
C81 "100nF/0603/50V" 0603_CAP 8.5,48.3 r90 top
C82 "1uF/0603/16V" 0603_CAP 6.859,48.309 r270 top
C83 "100nF/0603/50V" 0603_CAP 16.845,50.385 r90 top
C84 "100nF/0603/50V" 0603_CAP 16.845,43.889 r270 top
C85 "100nF/0603/50V" 0603_CAP 30.973,38.883 r0 top
C86 "100nF/0603/50V" 0603_CAP 32.209,43.186 r90 top
C87 "100nF/0603/50V" 0603_CAP 32.209,48.002 r90 top
C88 "100nF/0603/50V" 0603_CAP 32.21,60.788 r270 top
C89 "4u7F/0603/50V" 0603_CAP 18,3.5 r90 top
C91 "100nF/0603/50V" 0603_CAP 36.8,17.1 r180 top
C92 "?F/0603/?V/" 0603_CAP 23.95,22.375 r0 top
C93 "?F/0603/?V/" 0603_CAP 26.975,22.375 r180 top
C94 "100nF/0603/50V" 0603_CAP 20.783,32.888 r270 top
C95 "10uF/0603/25V" 0603_CAP 19.3,24.6 r90 top
C96 "100nF/0603/50V" 0603_CAP 20.8,24.6 r90 top
C97 "10uF/0603/25V" 0603_CAP 19.313,32.888 r270 top
C98 "100nF/0603/50V" 0603_CAP 69.16,63.9 r90 top
C99 "1uF/0603/16V" 0603_CAP 70.8,63.9 r270 top
C100 "100nF/0603/50V" 0603_CAP 103.973,74.037 r90 top
CN1 "MEM2061-01-188-00-A" GCT_MEM2061-01-188-00-A_REVA 50.334,8.227 r0 top
CN2 "DG128-5.0-02P-14-00AH" KLEMENS 21.5,79.5 r0 top
D1 "SMAJ4744A-TP" SOD323 42.9,74.1 r90 top
D2 "SCHOTKY DIODE" "DO214AC SMA" 52,72.6 r0 top value=B340AE-13
D3 "DESD5V0S1BA-7" SOD323 63.8,81.9 r90 top
D4 "SMAJ12CA" SOD323 29.5,77.5 r270 top
D5 "Value" "LED 0603_1608 GREEN" 47.5,69.75 r270 top
D6 "CDSOD323-T03" SOD323 72,72.6 r270 top
D7 "DESD5V0S1BA-7" SOD323 92.6,76.6 r90 top
D8 "USBLC6-2SC6" "TI SOT-23-6 DBV" 11.6,14 r0 top
D9 "DESD5V0S1BA-7" SOD323 113.5,68.9 r0 top
D10 "DESD5V0S1BA-7" SOD323 113.5,71.413 r0 top
D11 "DESD5V0S1BA-7" SOD323 113.5,73.939 r0 top
D12 "DESD5V0S1BA-7" SOD323 113.5,76.453 r0 top
D13 "DESD5V0S1BA-7" SOD323 113.5,9.123 r0 top
D14 "DESD5V0S1BA-7" SOD323 113.5,11.715 r0 top
D15 "DESD5V0S1BA-7" SOD323 113.5,14.287 r0 top
D16 "DESD5V0S1BA-7" SOD323 113.5,16.825 r0 top
D17 "ESD2CAN24DBZRQ1" "TI SOT-23-3 DBZ" 113.5,48.5 r0 top
D18 "SM712H-TP" "TI SOT-23-3 DBZ" 101.238,30.925 r0 top
D19 "USBLC6-2SC6" "TI SOT-23-6 DBV" 31,18.7 r90 top
D20 "" "DO214AC SMA" 22,72 r0 top
D21 "" "DO214AC SMA" 22,67.5 r0 top
D22 "Value" "LED 0603_1608 GREEN" 9.7,64.6 r180 top
FB1 "1kOhm@100MHz" 0805_FERRITE 42.55,80.5 r0 top
FB2 "1kOhm@100MHz" 0805_FERRITE 61,83.2 r0 top
FB3 "Value" 0805_FERRITE 63,65 r270 top
FB4 "Value" 0805_FERRITE 46.6,60.5 r270 top
FB5 "220Ohm@100MHz" 0805_FERRITE 12.917,18.879 r0 top
IC1 "DMPH6050SK3-13" "TO 252" 37.2,74.1 r180 top
J1 "Barrel Jack" CUI_PJ-002B 14,72.5 r180 top value=PJ-002B
J2 "*" USB4105_GCT 4.2,14 r270 top
J3 "4 Pin" "R/A HEADER (4PİN)" 117.5,59.196 r90 top value=2EDGRC-5.08-04P
J4 "6 Pin" "R/A HEADER" 117.5,72.67 r90 top value=2EDGRC-5.08-04P-14-00AH
J5 "6 Pin" "R/A HEADER" 117.5,13 r90 top value=2EDGRC-5.08-04P-14-00AH
J6 "4 Pin" "R/A HEADER (4PİN)" 117.5,48.262 r90 top value=2EDGRC-5.08-04P
J7 "4 Pin" "R/A HEADER (4PİN)" 117.5,37.328 r90 top value=2EDGRC-5.08-04P
J8 "4 Pin" "R/A HEADER (4PİN)" 117.5,26.394 r90 top value=2EDGRC-5.08-04P
J9 "L-KLS1-202C-40-S-B" L-KLS1-202C-40-T-B 59.825,22.665 r180 top locked
J10 "UE27AC5410H" UE27AC5410H 31.1,10.3 r0 top
J11 "14 Pin" L-KLS1-202C-14-S-B 66.73,15.135 r0 top locked
J12 "Value" TH_RA_6PINS_1.27MM 103.328,81.479 r180 top
J13 "Value" TH_RA_6PINS_1.27MM 97.43,81.479 r180 top
J14 "Value" TH_RA_6PINS_1.27MM 97.43,3.535 r0 top
J15 "Value" TH_RA_6PINS_1.27MM 109,81.479 r180 top
J16 "Value" TH_RA_6PINS_1.27MM 109,3.535 r0 top
J17 "Value" TH_RA_6PINS_1.27MM 103.328,3.535 r0 top
L1 "22uH" "IND(8.00MM X 8.00MM)" 63.3,74.6 r90 top
L4 "ACT45B-101-2P-TL003" "CMC((4.50MM X 3.20MM))" 104.75,41.775 r270 top
Q3 "SI2302-TP" "TI SOT-23-3 DBZ" 7.8,4 r180 top
R1 "600R/0603/%1" 0603_RES 45.5,69.651 r90 top
R2 "10K/0603/%1" 0603_RES 55.9,81.1 r0 top
R3 "100K/1206/%1" 1206_RES 38.9,68.9 r0 top
R4 "3K24/0603/%1" 0603_RES 52.7,81.1 r0 top
R5 "330R/0603/%1" 0603_res 13.2,64.6 r0 top
R6 "5K2/0603/%1" 0603_RES 11.9,9.7 r270 top
R7 "5K2/0603/%1" 0603_RES 13.9,9.7 r270 top
R8 "5K2/0603/%1" 0603_RES 15.9,9.7 r90 top
R9 "5K2/0603/%1" 0603_RES 9.9,9.7 r90 top
R12 "1K5/0603/%1" 0603_RES 79.797,55.334 r180 top
R13 "1K5/0603/%1" 0603_RES 91.669,54.834 r0 top
R14 "1K5/0603/%1" 0603_RES 79.763,52.678 r0 top
R15 "1K5/0603/%1" 0603_RES 91.669,53.134 r180 top
R16 "0R/0603/%1" 0603_RES 79.043,67.818 r180 top
R17 "0R/0603/%1" 0603_RES 92.778,67.818 r180 top
R18 "0R/0603/%1" 0603_RES 79.02,66.121 r180 top
R19 "0R/0603/%1" 0603_RES 92.776,66.152 r180 top
R20 "0R/0603/%1" 0603_RES 78.997,64.46 r180 top
R21 "0R/0603/%1" 0603_RES 92.778,64.485 r180 top
R22 "0R/0603/%1" 0603_RES 79.026,62.795 r180 top
R23 "0R/0603/%1" 0603_RES 92.778,62.818 r180 top
R24 "0R/0603/%1" 0603_RES 79.285,9.9 r180 top
R25 "0R/0603/%1" 0603_RES 92.4,9.9 r180 top
R26 "0R/0603/%1" 0603_RES 79.302,8.143 r180 top
R27 "0R/0603/%1" 0603_RES 92.4,8.167 r180 top
R28 "0R/0603/%1" 0603_RES 79.302,6.461 r180 top
R29 "0R/0603/%1" 0603_RES 92.4,6.433 r180 top
R30 "0R/0603/%1" 0603_RES 79.302,4.745 r180 top
R31 "0R/0603/%1" 0603_RES 92.4,4.7 r180 top
R32 "120R/0603/%1" 0603_RES 107.4,48.6 r90 top
R33 "60R/0603/%1" 0603_RES 110.7,46.95 r90 top
R34 "60R/0603/%1" 0603_RES 110.7,49.95 r270 top
R35 "10K/0603/%1" 0603_RES 98.6,46.15 r180 top
R36 "10K/0603/%1" 0603_RES 95.5,46.15 r180 top
R37 "510R/0603/%1" 0603_RES 101.232,28.047 r180 top
R38 "120R/0603/%1" 0603_RES 98.188,30.925 r90 top
R39 "510R/0603/%1" 0603_RES 101.232,33.829 r0 top
R40 "4K7/0603/%1" 0603_RES 102.5,23.85 r270 top
R41 "4K7/0603/%1" 0603_RES 97.9,23.85 r270 top
R42 "4K7/0603/%1" 0603_RES 104.1,23.9 r90 top
R43 "10K/0603/%1" 0603_RES 70.5,49.8 r180 top
R44 "10K/0603/%1" 0603_RES 70.5,51.5 r180 top
R45 "0R/0603/%1" 0603_RES 59.8,61.1 r0 top
R46 "0R/0603/%1" 0603_RES 59.8,59.5 r180 top
R47 "10K/0603/%1" 0603_RES 39.6,58.9 r0 top
R48 "0R/1206/%1" 1206_RES 44.3,61.1 r90 top
R49 "10K/0603/%1" 0603_RES 8.024,54.845 r0 top
R50 "10K/0603/%1" 0603_RES 11.2,61.8 r0 top
R51 "10K/0603/%1" 0603_RES 8.755,52.396 r90 top
R52 "22R/0603/%1" 0603_RES 7.195,52.396 r270 top
R53 "22R/0603/%1" 0603_RES 14.25,61.8 r180 top
R54 "22R/0603/%1" 0603_RES 7.985,56.602 r180 top
R55 "10K/0603/%1" 0603_RES 8.6,43 r270 top
R56 "10K/0603/%1" 0603_RES 9.062,39.439 r180 top
R57 "10K/0603/%1" 0603_RES 15.96,21.93 r180 top
R58 "10K/0603/%1" 0603_RES 9.1,37.4 r0 top
R59 "10K/0603/%1" 0603_RES 74.197,63.835 r270 top
R60 "10K/0603/%1" 0603_RES 74.635,59.822 r180 top
R61 "10K/0603/%1" 0603_RES 74.635,58.2 r180 top
R62 "0R/0603/%1" 0603_RES 76.5,17.5 r180 top
R63 "0R/0603/%1" 0603_RES 76.5,15.8 r180 top
R64 "0R/0603/%1" 0603_RES 76.5,12.4 r0 top
R65 "10K/0603/%1" 0603_RES 72.537,63.835 r270 top
R66 "10K/0603/%1" 0603_RES 74.635,61.481 r0 top
R67 "10K/0603/%1" 0603_RES 74.635,56.541 r0 top
R68 "0R/0603/%1" 0603_RES 76.5,14.1 r180 top
R69 "47K/0603/%1" 0603_RES 60.4,8.774 r180 top
R70 "47K/0603/%1" 0603_RES 60.4,6.934 r180 top
R71 "47K/0603/%1" 0603_RES 60.4,5.094 r180 top
R72 "47K/0603/%1" 0603_RES 60.4,3.254 r180 top
R73 "47K/0603/%1" 0603_RES 60.4,1.414 r180 top
R74 "23K/0603/%1" 0603_RES 48.5,64.4 r270 top
R75 "10K/0603/%1" 0603_RES 46.798,64.356 r90 top
R76 "0R/0603/%1" 0603_RES 60.4,10.6 r180 top
R77 "0R/1206/%1" 0603_RES 83.4,73.3 r180 top
R78 "10K/0603/%1" 0603_RES 65.1,59.7 r180 top
R79 "10K/0603/%1" 0603_RES 67.52,63.9 r90 top
R80 "10K/0603/%1" 0603_RES 65.88,63.9 r270 top
R81 "10K/0603/%1" 0603_RES 65.1,61.34 r0 top
R82 "0R/1206/%1" 1206_RES 85.8,37.3 r180 top
R83 "0R/1206/%1" 1206_RES 85.8,1.9 r180 top
R84 "0R/1206/%1" 1206_RES 85.8,60.8 r180 top
R85 "10K/0603/%1" 0603_RES 8.1,62.7 r0 top
R86 "220R/0603/%1" 0603_RES 7.7,21.7 r180 top
R87 "0R/0603/%1" 0603_RES 7.7,35.3 r180 top
R88 "33K/0603/%1" 0603_RES 12,38.2 r90 top
R89 "82K/0603/%1" 0603_RES 13.7,38.2 r270 top
R90 "10K/0603/%1" 0603_RES 11.3,2.7 r180 top
R91 "10K/0603/%1" 0603_RES 11.3,4.8 r0 top
R92 "150R/0603/%1" 0603_RES 3.2,21.8 r0 top
R93 "10K/0603/%1" 0603_RES 3,35.4 r0 top
R94 "0R/0603/%1" 0603_RES 32.4,34.5 r90 top
R95 "0R/0603/%1" 0603_RES 30.7,34.5 r90 top
SW1 "TA3-4W2-V-T/R" SW_SMD_R/A 3,62.4 r270 top
SW2 "450302014072" 450302014072 2.086,41.853 r90 top
SW3 "TA3-4W2-V-T/R" SW_SMD_R/A 3,51.9 r270 top
TP1 "Test Point" TP 47,74 r90 top
TP2 "Test Point" TP 68.5,78 r90 top
TP3 "Test Point" TP 69.9,71.3 r90 top
TP4 "Test Point" TP 98.773,76.887 r90 top
TP5 "Test Point" TP 22.8,17 r90 top
TP6 "Test Point" TP 17.6,19.8 r90 top
TP7 "Test Point" TP 39.3,22.22 r90 top
TP8 "Test Point" TP 39.3,20.823 r90 top
TP9 "Test Point" TP 30.4,23.5 r90 top
TP10 "Test Point" TP 31.7,23.5 r90 top
TP11 "Test Point" TP 32.8,32 r180 top
TP12 "Test Point" TP 30.3,32 r180 top
TP13 "Test Point" TP 104.293,76.951 r90 top
U1 "*" SOIC-8(3.90MM) 54.3,77.5 r180 top
U2 "LD1117AS33TR" SOT-223 74.7,79.4 r270 top
U3 "*" SIP4 86.27,79.9 r0 top
U4 "AP7366EA-33W5-7" SOT25 19.546,13.884 r0 top
U5 "ISO1541DR" SOIC-8(3.90MM) 85.669,54.04 r0 top
U6 "ISO7041" "16-SSOP (0.154\", 3.90MM WIDTH)" 85.812,65.212 r0 top value=ISO7041DBQR
U7 "ISO7041" "16-SSOP (0.154\", 3.90MM WIDTH)" 85.724,7.412 r0 top value=ISO7041DBQR
U8 "MCP2562FD-E/SN" SOIC-8(3.90MM) 94.362,42.444 r0 top
U9 "ISO6721FBDR" SOIC-8(3.90MM) 85.621,42.539 r0 top
U10 "MAX22028FAWA+" "8-SOIC (0.209\", 5.30MM WIDTH)" 85.795,30.925 r0 top
U11 "TS5A23157QDGSRQ1" VSSOP-10 77.5,39.15 r90 top
U12 "MAX3221EIPWR" 16-TSSOP 100.4,17.95 r90 top
U13 "ISO6721FBDR" SOIC-8(3.90MM) 85.718,19.455 r0 top
U14 "STM32H723ZGT6" "ST LQFP-144 20X20MM" 54.4,45.4 r270 top
U15 "IS42S16160J-7TLI" TSOP-II-54 24.417,51.185 r180 top
U16 "W25Q16JVSSIQ" "8-SOIC (0.209\", 5.30MM WIDTH)" 12.537,55.67 r90 top
U17 "IS66WVS2M8BLL-104NLI" SOIC-8(3.90MM) 12.4,44.87 r90 top
U18 "LTV816S2TPC-V-G" "4-SMD, GULL WING" 14.244,28.563 r180 top
U19 "ADUM3165BRSZ-RL" SSOP-20 25.687,28.79 r90 top
U20 "TS3USB30ERSWR" VSSOP-10 36.8,21.5 r270 top
U21 "LM75BDP,118" 8-TSSOP 69.6,60.5 r0 top
U22 "AP7366EA-33W5-7" SOT25 100.973,73.837 r0 top
U23 "LTV816S2TPC-V-G" "4-SMD, GULL WING" 8.396,28.563 r0 top
U24 "STMPS2141STR" SOT-23-5 14.9,3.975 r180 top
U25 "LTV816S2TPC-V-G" "4-SMD, GULL WING" 2.7,28.8 r180 top
Y1 "Value" SMD4-NOLEAD 52.1,62.2 r0 top value=ABM8-25.000MHZ-10-D1G-T
Y2 "Value" SMD4-NOLEAD 25.4,19.675 r0 top value=ABM8-25.000MHZ-10-D1G-T

## Footprints (in the part's own frame and the unit in brackets; to place one, negate y for a bottom-side part, rotate by r counter-clockwise, add the part's x,y. Pads: shape width x height; smd on the part's side, far side on the other; paste and mask are expansions set on the pad)
"4-SMD, GULL WING" [mm]
  rect 1.4x1.6 smd: 1(-1.27,-4.68) 2(1.27,-4.68) 3(1.27,4.68) 4(-1.27,4.68)
  silkscreen extent -2.3,-3.25 2.3,3.25, body extent -2.3,-5.08 2.3,5.08, height 4.6
"8-SOIC (0.209\", 5.30MM WIDTH)" [mm]
  oval 1.55x0.6 smd: 1(-3.65,1.905) 2(-3.65,0.635) 3(-3.65,-0.635) 4(-3.65,-1.905) 5(3.65,-1.905) 6(3.65,-0.635) 7(3.65,0.635) 8(3.65,1.905)
  silkscreen extent -3.77,-2.65 2.47,2.88, body extent -4.01,-2.64 4.01,2.64, height 1.5
8-TSSOP [mil]
  rrect50% 60x18 smd paste+0 mask+0: 1(-80.5,38.39) 2(-80.5,12.8) 3(-80.5,-12.8) 4(-80.5,-38.39) 5(80.5,-38.39) 6(80.5,-12.8) 7(80.5,12.8) 8(80.5,38.39)
  silkscreen extent -64,-64 64,64, body extent -96,-59 96,59, height 43
"16-SSOP (0.154\", 3.90MM WIDTH)" [mil]
  rrect50% 57.5x14 smd: 1(-107.25,87.5) 2(-107.25,62.5) 3(-107.25,37.5) 4(-107.25,12.5) 5(-107.25,-12.5) 6(-107.25,-37.5) 7(-107.25,-62.5) 8(-107.25,-87.5) 9(107.25,-87.5) 10(107.25,-62.5) 11(107.25,-37.5) 12(107.25,-12.5) 13(107.25,12.5) 14(107.25,37.5) 15(107.25,62.5) 16(107.25,87.5)
  silkscreen extent -69,-104 69,104, body extent -122,-99 122,99, height 69
16-TSSOP [mm] "TSSOP, 16-Leads, Body 5.00x4.40mm, Pitch 0.65mm, IPC Medium Density"
  oval 1.6x0.35 smd: 1(-2.8,2.275) 2(-2.8,1.625) 3(-2.8,0.975) 4(-2.8,0.325) 5(-2.8,-0.325) 6(-2.8,-0.975) 7(-2.8,-1.625) 8(-2.8,-2.275) 9(2.8,-2.275) 10(2.8,-1.625) 11(2.8,-0.975) 12(2.8,-0.325) 13(2.8,0.325) 14(2.8,0.975) 15(2.8,1.625) 16(2.8,2.275)
  silkscreen extent -2.92,-2.55 1.6,3.12, body extent -3.21,-2.5 3.21,2.5, height 1.2
0603_CAP [mm]
  rrect50% 0.8x0.95 smd: 1(-0.8,0) 2(0.8,0)
  silkscreen extent -1.4,-0.7 1.4,0.7, body extent -0.8,-0.41 0.8,0.41, height 0.82
0603_RES [mm]
  rrect50% 0.8x0.95 smd: 1(-0.8,0) 2(0.8,0)
  silkscreen extent -1.4,-0.7 1.4,0.7, body extent -0.8,-0.4 0.8,0.4, height 0.45
0603_res [mm]
  rrect50% 0.8x0.95 smd: 1(-0.8,0) 2(0.8,0)
  silkscreen extent -1.4,-0.7 1.4,0.7, body extent -0.8,-0.4 0.8,0.4, height 0.45
0805_CAP [mm]
  rrect50% 0.9x1.45 smd: 1(-0.95,0) 2(0.95,0)
  silkscreen extent -1.61,-0.93 1.61,0.94, body extent -1,-0.64 1,0.64, height 1.27
0805_FERRITE [mm]
  rrect50% 0.9x1.45 smd: 1(-0.95,0) 2(0.95,0)
  silkscreen extent -1.61,-0.93 1.61,0.94, body extent -1,-0.64 1,0.64, height 1.26
1206_RES [mm]
  rrect50% 1.15x1.8 smd: 1(-1.45,0) 2(1.45,0)
  silkscreen extent -2.24,-1.08 2.23,1.1, body extent -1.6,-0.8 1.6,0.8, height 0.6
450302014072 [mm]
  round 1.308 hole 0.8: 1(0,-3.4) 2(-2.54,-3.4) 3(2.54,-3.4)
  silkscreen extent -5.1,-3.1 5.1,2.1, body extent -5,-3.75 5,3.35, height 2.5
BATT_CONN [mm]
  round 1 hole 0.7: 1(-1,0) 2(1,0)
  silkscreen extent -2.95,-2.85 2.95,1.65, body extent -2.95,-2.85 2.95,1.65, height 6
"CAP ALSMD 6.6MM" [mm] "Aluminum SMD Electrolytic Capacitor, 6.60mm Land Size, 6.30mm Diameter, 5.65mm Height, 8.00mm Maximum Leads Span"
  rect 3.3x1.3 smd: 1(-3.2,0) 2(3.2,0)
  silkscreen extent -3.3,-3.3 3.3,3.3, body extent -4,-3.3 4,3.3, height 5.65
"CAP POL 1206_3216" [mm] "Molded Capacitor, 2-Leads, Body 3.20x1.6mm, IPC Medium Density"
  rect 1.8x1.23 smd: 1(-1.31,0) 2(1.31,0)
  silkscreen extent -3.22,-0.9 2.5,1.32, body extent -1.72,-0.85 1.71,0.85, height 1.7
"CMC((4.50MM X 3.20MM))" [mm]
  rect 1.35x0.9 smd: 1(-2.275,1.25) 2(-2.275,-1.25) 3(2.275,-1.25) 4(2.275,1.25)
  silkscreen extent -3.8,-1.6 2.25,1.6, body extent -2.25,-1.6 2.25,1.6, height 3
CUI_PJ-002B [mm]
  oval 2.5x5 hole 1 slot 3.5 at 90 deg: 1(0,0)
  oval 2.25x4.5 hole 1 slot 3 at 90 deg: 2(6,0)
  oval 4.5x2.25 hole 1 slot 3 at 0 deg: 3(3,4.7)
  silkscreen extent -2.2,-4.5 13.7,4.5, body extent -0.9,-4.7 13.5,4.7, height 11
"DO214AC SMA" [mm] "Molded Diode, 2-Leads, Body 4.30x2.60mm, IPC Medium Density"
  rect 2x2.5 smd: 1(-2.185,0) 2(2.185,0)
  silkscreen extent -3.08,-1.65 3.25,1.65, body extent -2.6,-1.37 2.6,1.37, height 2.4
GCT_MEM2061-01-188-00-A_REVA [mm]
  rect 0.8x2 smd: 1(1.94,-3.225) 2(0.84,-2.825) 3(-0.26,-3.225) 4(-1.36,-3.425) 5(-2.46,-3.225) 6(-3.56,-3.425) 7(-4.66,-3.225) 8(-5.76,-3.225)
  rect 1.8x1.4 smd: 9(-4.95,7.325) 10(0.75,7.325)
  rect 1.4x1.9 smd: 11(-6.55,-5.825) 12(6.6,-6.825)
  Keep-Out Layer region: 3.37,3.1 -7.011,3.1 -7.011,5.175 3.37,5.175
  silkscreen extent -7,-7.73 7,7.73, body extent -7.1,-7.73 7.1,7.73, height 1.88
"IND(8.00MM X 8.00MM)" [mm]
  rect 2.85x6.6 smd: 1(-3.325,0) 2(3.325,0)
  silkscreen extent -4,-4 4,4, body extent -4,-4 4,4, height 4
KLEMENS [mm]
  round 2 hole 1.1: 1(-2.5,0) 2(2.5,0)
  silkscreen extent -5.07,-4.98 5.5,5.22, body extent -5.07,-4.98 5.5,5.22, height 14
L-KLS1-202C-14-S-B [mm]
  rect 1x1 hole 0.7: 1(-3.81,-0.635)
  round 1 hole 0.7: 2(-3.81,0.635) 3(-2.54,-0.635) 4(-2.54,0.635) 5(-1.27,-0.635) 6(-1.27,0.635) 7(0,-0.635) 8(0,0.635) 9(1.27,-0.635) 10(1.27,0.635) 11(2.54,-0.635) 12(2.54,0.635) 13(3.81,-0.635) 14(3.81,0.635)
  silkscreen extent -7.59,-3.27 7.5,2.55, body extent -7.59,-2.55 7.59,2.55, height 5.4
L-KLS1-202C-40-T-B [mm] "BOX HEADER 40PIN(2x20) 1.27mm SMT V/T MALE BLACK"
  rect 0.7x3 smd: 1(-12.065,-2.3) 2(-12.065,2.3) 3(-10.795,-2.3) 4(-10.795,2.3) 5(-9.525,-2.3) 6(-9.525,2.3) 7(-8.255,-2.3) 8(-8.255,2.3) 9(-6.985,-2.3) 10(-6.985,2.3) 11(-5.715,-2.3) 12(-5.715,2.3) 13(-4.445,-2.3) 14(-4.445,2.3) 15(-3.175,-2.3) 16(-3.175,2.3) 17(-1.905,-2.3) 18(-1.905,2.3) 19(-0.635,-2.3) 20(-0.635,2.3) 21(0.635,-2.3) 22(0.635,2.3) 23(1.905,-2.3) 24(1.905,2.3) 25(3.175,-2.3) 26(3.175,2.3) 27(4.445,-2.3) 28(4.445,2.3) 29(5.715,-2.3) 30(5.715,2.3) 31(6.985,-2.3) 32(6.974,2.3) 33(8.255,-2.3) 34(8.255,2.3) 35(9.525,-2.3) 36(9.525,2.3) 37(10.795,-2.3) 38(10.784,2.3) 39(12.065,-2.3) 40(12.054,2.3)
  silkscreen extent -15.85,-4 15.85,3.9, body extent -15.85,-2.75 15.85,2.75, height 5.6
"LED 0603_1608 GREEN" [mm] "Chip Diode, 2-Leads, Body 1.60x0.80mm, IPC Medium Density"
  rect 0.8x0.8 smd: 1(-0.75,0) 2(0.75,0)
  silkscreen extent -1.52,-0.7 1.52,0.7, body extent -0.8,-0.4 0.8,0.4, height 0.53
"R/A HEADER" [mm]
  rect 1.7x1.7 hole 1: 1(-6.35,0)
  round 1.7 hole 1: 2(-3.81,0) 3(-1.27,0) 4(1.27,0) 5(3.81,0) 6(6.35,0)
  silkscreen extent -8,-9 7.6,1.2, body extent -7.49,-8.99 7.49,1.18, height 6.35
"R/A HEADER (4PİN)" [mm]
  rect 1.7x1.7 hole 1: 1(-3.81,0)
  round 1.7 hole 1: 2(-1.27,0) 3(1.27,0) 4(3.81,0)
  silkscreen extent -5.46,-9 5.1,1.2, body extent -4.95,-8.99 4.95,1.18, height 6.35
SIP4 [mil]
  rect 65x65 / inner round 60 / far side rect 65x65 hole 45 paste-99999 mask+0: 1(-150,0)
  round 65 / inner round 60 / far side round 65 hole 45 paste-99999 mask+0: 2(-50,0) 3(50,0) 4(150,0)
  silkscreen extent -230,-54 233,192, body extent -226,-51 226,185, height 374
SMD4-NOLEAD [mm] "Crystal, 4-Leads, Body 2.50x3.20mm, Pitch 2.20mm, IPC Medium Density"
  rect 1.4x1.2 smd: 1(-1.1,-0.85) 2(1.1,-0.85) 3(1.1,0.85) 4(-1.1,0.85)
  silkscreen extent -2.25,-1.85 2.1,1.7, body extent -1.61,-1.26 1.61,1.26, height 0.6
SOD323 [mm] "SOD, 2-Leads, Body 1.25x2.50mm, IPC Medium Density"
  rect 0.625x0.83 smd: 1(-1.312,0) 2(1.312,0)
  silkscreen extent -1.78,-0.8 1.78,0.8, body extent -1.36,-0.63 1.36,0.62, height 1.05
SOIC-8(3.90MM) [mm] "Package SOIC-8, 8-Leades, 4.90 x 3.89 mm Body , Pitch 1.27 mm"
  oval 1.55x0.6 smd: 1(-2.7,1.905) 2(-2.7,0.635) 3(-2.7,-0.635) 4(-2.7,-1.905) 5(2.7,-1.905) 6(2.7,-0.635) 7(2.7,0.635) 8(2.7,1.905)
  silkscreen extent -3.65,-2.45 2.05,2.75, body extent -3,-2.45 3,2.45, height 1.75
SOT25 [mm] "SOT25, 5-Leads, Body 3.00x2.85mm, Pitch 0.95mm, IPC Medium Density"
  rect 1.05x0.6 smd: 1(-1.35,0.95) 2(-1.35,0) 3(-1.35,-0.95) 4(1.35,-0.95) 5(1.35,0.95)
  silkscreen extent -1.47,-1.55 0.45,1.92, body extent -1.5,-1.55 1.5,1.55, height 1.45
SOT-23-5 [mm] "SOT23, 5-Leads, Body 2.90x2.80mm, Pitch 0.95mm, IPC Medium Density"
  oval 1x0.55 smd: 1(-1.35,0.95) 2(-1.35,0) 3(-1.35,-0.95) 4(1.35,-0.95) 5(1.35,0.95)
  silkscreen extent -1.48,-1.55 0.5,1.9, body extent -1.44,-1.42 1.39,1.48, height 1.5
SOT-223 [mm] "SOT223, 4-Leads, Body 6.50x7.00mm (avg), Pitch 2.30mm, IPC Medium Density"
  rect 2x1.5 smd: 1(-3.15,2.3) 2(-3.15,0) 3(-3.15,-2.3)
  rect 2x3.8 smd: 4(3.15,0)
  silkscreen extent -3.27,-3.35 1.85,3.73, body extent -3.52,-3.25 3.5,3.25, height 1.8
SSOP-20 [mm] "SSOP, 20-Leads, Body 7.20x5.30mm, Pitch 0.65mm, IPC Medium Density"
  oval 1.65x0.5 smd: 1(-3.625,2.925) 2(-3.625,2.275) 3(-3.625,1.625) 4(-3.625,0.975) 5(-3.625,0.325) 6(-3.625,-0.325) 7(-3.625,-0.975) 8(-3.625,-1.625) 9(-3.625,-2.275) 10(-3.625,-2.925) 11(3.625,-2.925) 12(3.625,-2.275) 13(3.625,-1.625) 14(3.625,-0.975) 15(3.625,-0.325) 16(3.625,0.325) 17(3.625,0.975) 18(3.625,1.625) 19(3.625,2.275) 20(3.625,2.925)
  silkscreen extent -3.75,-3.75 2.4,3.85, body extent -3.91,-3.6 3.91,3.6, height 1.97
"ST LQFP-144 20X20MM" [mm] "LQFP, 144-Leads, Body 20.00x20.00mm, Pitch 0.50mm, IPC Medium Density"
  oval 1.35x0.35 smd: 1(-10.62,8.75) 2(-10.62,8.25) 3(-10.62,7.75) 4(-10.62,7.25) 5(-10.62,6.75) 6(-10.62,6.25) 7(-10.62,5.75) 8(-10.62,5.25) 9(-10.62,4.75) 10(-10.62,4.25) 11(-10.62,3.75) 12(-10.62,3.25) 13(-10.62,2.75) 14(-10.62,2.25) 15(-10.62,1.75) 16(-10.62,1.25) 17(-10.62,0.75) 18(-10.62,0.25) 19(-10.62,-0.25) 20(-10.62,-0.75) 21(-10.62,-1.25) 22(-10.62,-1.75) 23(-10.62,-2.25) 24(-10.62,-2.75) 25(-10.62,-3.25) 26(-10.62,-3.75) 27(-10.62,-4.25) 28(-10.62,-4.75) 29(-10.62,-5.25) 30(-10.62,-5.75) 31(-10.62,-6.25) 32(-10.62,-6.75) 33(-10.62,-7.25) 34(-10.62,-7.75) 35(-10.62,-8.25) 36(-10.62,-8.75) 73(10.62,-8.75) 74(10.62,-8.25) 75(10.62,-7.75) 76(10.62,-7.25) 77(10.62,-6.75) 78(10.62,-6.25) 79(10.62,-5.75) 80(10.62,-5.25) 81(10.62,-4.75) 82(10.62,-4.25) 83(10.62,-3.75) 84(10.62,-3.25) 85(10.62,-2.75) 86(10.62,-2.25) 87(10.62,-1.75) 88(10.62,-1.25) 89(10.62,-0.75) 90(10.62,-0.25) 91(10.62,0.25) 92(10.62,0.75) 93(10.62,1.25) 94(10.62,1.75) 95(10.62,2.25) 96(10.62,2.75) 97(10.62,3.25) 98(10.62,3.75) 99(10.62,4.25) 100(10.62,4.75) 101(10.62,5.25) 102(10.62,5.75) 103(10.62,6.25) 104(10.62,6.75) 105(10.62,7.25) 106(10.62,7.75) 107(10.62,8.25) 108(10.62,8.75)
  oval 0.35x1.35 smd: 37(-8.75,-10.62) 38(-8.25,-10.62) 39(-7.75,-10.62) 40(-7.25,-10.62) 41(-6.75,-10.62) 42(-6.25,-10.62) 43(-5.75,-10.62) 44(-5.25,-10.62) 45(-4.75,-10.62) 46(-4.25,-10.62) 47(-3.75,-10.62) 48(-3.25,-10.62) 49(-2.75,-10.62) 50(-2.25,-10.62) 51(-1.75,-10.62) 52(-1.25,-10.62) 53(-0.75,-10.62) 54(-0.25,-10.62) 55(0.25,-10.62) 56(0.75,-10.62) 57(1.25,-10.62) 58(1.75,-10.62) 59(2.25,-10.62) 60(2.75,-10.62) 61(3.25,-10.62) 62(3.75,-10.62) 63(4.25,-10.62) 64(4.75,-10.62) 65(5.25,-10.62) 66(5.75,-10.62) 67(6.25,-10.62) 68(6.75,-10.62) 69(7.25,-10.62) 70(7.75,-10.62) 71(8.25,-10.62) 72(8.75,-10.62) 109(8.75,10.62) 110(8.25,10.62) 111(7.75,10.62) 112(7.25,10.62) 113(6.75,10.62) 114(6.25,10.62) 115(5.75,10.62) 116(5.25,10.62) 117(4.75,10.62) 118(4.25,10.62) 119(3.75,10.62) 120(3.25,10.62) 121(2.75,10.62) 122(2.25,10.62) 123(1.75,10.62) 124(1.25,10.62) 125(0.75,10.62) 126(0.25,10.62) 127(-0.25,10.62) 128(-0.75,10.62) 129(-1.25,10.62) 130(-1.75,10.62) 131(-2.25,10.62) 132(-2.75,10.62) 133(-3.25,10.62) 134(-3.75,10.62) 135(-4.25,10.62) 136(-4.75,10.62) 137(-5.25,10.62) 138(-5.75,10.62) 139(-6.25,10.62) 140(-6.75,10.62) 141(-7.25,10.62) 142(-7.75,10.62) 143(-8.25,10.62) 144(-8.75,10.62)
  silkscreen extent -10.72,-9.5 9.5,9.62, body extent -11.01,-11.01 11.01,11.01, height 1.63
SW_SMD_R/A [mm]
  rect 1x4.2 smd: 0(-3.5,-0.4) 0(3.5,-0.4)
  rect 1.2x4.1 smd: 1(-2,0) 2(2,0)
  silkscreen extent -4.4,-3.1 4.38,2.46, body extent -3.89,-7.45 3.89,1.54, height 6.57
TH_RA_6PINS_1.27MM [mm]
  round 1 hole 0.7: 1(-1.27,0.635) 2(0,0.635) 3(1.27,0.635) 4(1.27,-0.635) 5(0,-0.635) 6(-1.27,-0.635)
  silkscreen extent -1.65,-2.29 1.65,-2.29, body extent -1.91,-5.28 1.91,0.84, height 3.4
"TI SOT-23-3 DBZ" [mm] "SOT23, 3-Leads, Body 2.92x2.37mm, Pitch 0.95mm, IPC Medium Density"
  rect 1.05x0.6 smd: 1(-1.185,0.95) 2(-1.185,-0.95) 3(1.185,0)
  silkscreen extent -1.31,-1.5 0.7,1.92, body extent -1.32,-1.52 1.32,1.52, height 1.12
"TI SOT-23-6 DBV" [mm] "SOT23, 6-Leads, Body 2.90x2.80mm, Pitch 0.95mm, IPC Medium Density"
  rect 1x0.55 smd: 1(-1.35,0.95) 2(-1.35,0) 3(-1.35,-0.95) 4(1.35,-0.95) 5(1.35,0) 6(1.35,0.95)
  silkscreen extent -1.47,-1.55 0.5,1.9, body extent -1.44,-1.53 1.44,1.52, height 1.45
"TO 252" [mm] "DPAK, Body 9.94x6.56mm"
  rect 6.4x5.8 smd: D(3.2,0)
  rect 2.2x1.2 smd: G(-3.2,2.29) S(-3.2,-2.29)
  silkscreen extent -3.32,-3.35 -0.15,3.56, body extent -3.96,-3.37 5.98,3.37, height 2.41
TP [mm]
  round 0.5 smd: 1(0,0)
  silkscreen extent -0.35,-0.35 0.35,0.35
TSOP-II-54 [mm]
  oval 1.295x0.6 smd: 1(-5.728,10.4) 2(-5.728,9.6) 3(-5.728,8.8) 4(-5.728,8) 5(-5.728,7.2) 6(-5.728,6.4) 7(-5.728,5.6) 8(-5.728,4.8) 9(-5.728,4) 10(-5.728,3.2) 11(-5.728,2.4) 12(-5.728,1.6) 13(-5.728,0.8) 14(-5.728,0) 15(-5.728,-0.8) 16(-5.728,-1.6) 17(-5.728,-2.4) 18(-5.728,-3.2) 19(-5.728,-4) 20(-5.728,-4.8) 21(-5.728,-5.6) 22(-5.728,-6.4) 23(-5.728,-7.2) 24(-5.728,-8) 25(-5.728,-8.8) 26(-5.728,-9.6) 27(-5.728,-10.4) 28(5.728,-10.4) 29(5.728,-9.6) 30(5.728,-8.8) 31(5.728,-8) 32(5.728,-7.2) 33(5.728,-6.4) 34(5.728,-5.6) 35(5.728,-4.8) 36(5.728,-4) 37(5.728,-3.2) 38(5.728,-2.4) 39(5.728,-1.6) 40(5.728,-0.8) 41(5.728,0) 42(5.728,0.8) 43(5.728,1.6) 44(5.728,2.4) 45(5.728,3.2) 46(5.728,4) 47(5.728,4.8) 48(5.728,5.6) 49(5.728,6.4) 50(5.728,7.2) 51(5.728,8) 52(5.728,8.8) 53(5.728,9.6) 54(5.728,10.4)
  silkscreen extent -6.38,-11.11 4.73,11.11, body extent -5.88,-11.11 5.88,11.11, height 1.2
UE27AC5410H [mm]
  rect 1.508x1.508 / inner round 1.508 / far side rect 1.508x1.508 hole 1: 01(-3.5,2.71)
  round 1.508 hole 1: 02(-1,2.71) 03(1,2.71) 04(3.5,2.71)
  round 3.396 hole 2.38: S1(-6.57,0) S2(6.57,0)
  silkscreen extent -7.25,-10.28 7.25,4.2, body extent -7.42,-10.37 7.42,3.43, height 7.63
USB4105_GCT [mm]
  oval 1.3x1.8 hole 0.8 slot 1.3 at 90 deg paste-2539.97 mask-0.902: 13(-4.32,-1.269) 14(4.32,-1.269)
  oval 1.3x1.8 hole 0.8 slot 1.3 at 90 deg paste-1.054 mask-1.054: 15(-4.32,2.911)
  oval 1.3x1.8 hole 0.8 slot 1.3 at 90 deg paste-2539.97 mask-1.054: 16(4.32,2.911)
  round 0.66 / inner round 1.524 / far side round 0.66 hole 0.66 unplated paste-2539.97 mask+0: 17(-2.89,2.411) 18(2.89,2.411)
  rect 0.584x1.143 smd paste-0.572 mask-0.572: A1-B12(-3.2,3.486) A4-B9(-2.4,3.486) B1-A12(3.2,3.486) B4-A9(2.4,3.486)
  rect 0.305x1.143 smd paste+0 mask+0: A5(-1.25,3.486) A6(-0.25,3.486) A7(0.25,3.486) A8(1.25,3.486) B5(1.75,3.486) B6(0.75,3.486) B7(-0.75,3.486) B8(-1.75,3.486)
  silkscreen extent -7.07,-3.99 4.91,3.87, body extent -4.47,-3.88 4.47,3.83, height 3.31
VSSOP-10 [mm] "TSSOP, 10-Leads, Body 3.00x3.00mm, Pitch 0.50mm, IPC Medium Density"
  oval 1.45x0.3 smd: 1(-2.2,1) 2(-2.2,0.5) 3(-2.2,0) 4(-2.2,-0.5) 5(-2.2,-1) 6(2.2,-1) 7(2.2,-0.5) 8(2.2,0) 9(2.2,0.5) 10(2.2,1)
  silkscreen extent -2.32,-1.55 1.15,1.82, body extent -2.45,-1.55 2.45,1.55, height 1.1

## Part data
BT1: library part battery_conn, Assembly=., HelpURL=https://www.ozdisan.com/p/pcb-konnektorler-310/connfly-ds1066-2mvw6x-423540, PN=DS1066-2MVW6X
C1 C2 C3 C5 C7 C8 C9 C10 C11 C12 C13 C14 C15 C16 C17 C18 C19 C20 C21 C22 C23 C24 C25 C26 C27 C28 C29 C30 C31 C32 C33 C34 C35 C37 C38 C39 C40 C41 C42 C43 C44 C45 C46 C47 C48 C49 C50 C51 C52 C53 C54 C55 C56 C57 C58 C59 C60 C61 C62 C63 C64 C65 C66 C67 C68 C69 C70 C71 C72 C73 C74 C75 C76 C77 C78 C79 C80 C81 C82 C83 C84 C85 C86 C87 C88 C89 C91 C92 C93 C94 C95 C96 C97 C98 C99 C100: library part Capacitor
C4: library part "Polarised Capacitor IPC", "SMT Polarised Capacitor"
C6: library part tantalcap, MFC PN=TLJA107M010R1400
CN1: "10 (8 + 2) Position Card Connector Secure Digital - microSD™ Surface Mount, Right Angle Gold", Assembly=., HelpURL=https://www.digikey.com/en/products/detail/gct/MEM2061-01-188-00-A/9859612?s=N4IgTCBcDaILIFE5gAwDYCMBaF2MA58cUsBBEAXQF8g, PN=MEM2061-01-188-00-A
CN2: library part klemens_2p, Parameter 2=DG128-5.0-02P-14-00AH, Parameter 3=DG128-5.0-02P-14-00AH
D1: library part "Diode Zener", "Zener Diode", Assembly=., HelpURL=https://www.digikey.com/en/products/detail/mcc-micro-commercial-components/SMAJ4744A-TP/950471?s=N4IgTCBcDaIMoFkCCApALAdjWpBaAKgAogC6AvkA, PN=SMAJ4744A-TP
D3 D4 D6 D7 D9 D10 D11 D12 D13 D14 D15 D16: library part "TVS BI", "Zener Diode", Assembly=.
  D3 D7 D9 D10 D11 D12 D13 D14 D15 D16: HelpURL=https://www.digikey.com/en/products/detail/diodes-incorporated/DESD5V0S1BA-7/3451477?s=N4IgTCBcDaICIFEDKcCsA1ADEgjAIQEEBaAdhAF0BfIA, PN=DESD5V0S1BA-7
  D4: HelpURL=https://www.digikey.com/en/products/detail/bourns-inc/SMAJ12CA/2254385, PN=SMAJ12CA
  D6: HelpURL=https://www.digikey.com/en/products/detail/bourns-inc/CDSOD323-T03/3742076, PN=CDSOD323-T03
D5 D22: library part LED, "Chip LED"
D8 D19: "17V Clamp 5A (8/20µs) Ipp Tvs Diode Surface Mount SOT-23-6", Assembly=., HelpURL=https://www.digikey.com/en/products/detail/stmicroelectronics/USBLC6-2SC6/1040559, PN=USBLC6-2SC6
D17: library part SM712H-TP, "37V (Typ) Clamp 5.7A (8/20µs) Ipp Tvs Diode Surface Mount SOT-23-3", Assembly=., HelpURL=https://www.digikey.com/en/products/detail/texas-instruments/ESD2CAN24DBZRQ1/16982061, PN=ESD2CAN24DBZRQ1
D18: "TVS DIODE 12VWM 28VC SOT23", Assembly=., HelpURL=https://www.digikey.com/en/products/detail/mcc-micro-commercial-components/SM712H-TP/12177158, PN=SM712H-TP
D20 D21: library part Diode, "Rectifier Diode"
FB1 FB2 FB3 FB4 FB5: library part "Ferrite Chip", "SMT Ferrite Chip"
IC1: library part "P-CHN MOS", Assembly=., HelpURL=https://www.digikey.com/en/products/detail/diodes-incorporated/DMPH6050SK3-13/6010147, PN=DMPH6050SK3-13
J1: library part "Barrel Connector", Assembly=., HelpURL=https://www.digikey.com/en/products/detail/same-sky-formerly-cui-devices/PJ-002B/96965, PN=PJ-002B
J2: library part "USB2.0 TYP C", "No Description Available"
J9: library part 2X20, "BOX HEADER 40PIN(2x20) 1.27MM THT V/T MALE BLACK", Assembly=., HelpURL=https://www.ozdisan.com/p/box-headerlar-295/kls-electronic-l-kls1-202c-40-s-b-531010, PN=L-KLS1-202C-40-S-B
J10: library part "USB 2.0 TYPE A", Assembly=., HelpURL=https://www.ozdisan.com/p/usb-konnektorler-357/amphenol-ue27ac5410h-625506, PN=UE27AC5410H
J12 J13 J14 J15 J16 J17: library part 2x3_header
L1: library part Inductor, "SMT Inductor", Assembly=., HelpURL=https://www.digikey.com/en/products/detail/bourns-inc/SRN8040TA-220M/6155131, PN=SRN8040TA-220M
L4: library part cmc, "100 µH @ 100 kHz 2 Line Common Mode Choke Surface Mount 5.8 kOhms @ 10 MHz 150mA DCR 2Ohm", Assembly=., Help URL=https://www.digikey.com/en/products/detail/tdk-corporation/ACT45B-101-2P-TL003/1950643?s=N4IgTCBcDaIIIGEAqAWArAIQLQEYAMOWYAClkgDJ54DMIAugL5A, PN=ACT45B-101-2P-TL003
Q3: library part "N-CHN MOS SOT", "MOSFET N-CH 20V 3A SOT-23", Assembly=., Help URL=https://www.digikey.com/en/products/detail/mcc-micro-commercial-components/SI2302-TP/1793243, PN=SI2302-TP
R1 R2 R3 R4 R5 R6 R7 R8 R9 R12 R13 R14 R15 R16 R17 R18 R19 R20 R21 R22 R23 R24 R25 R26 R27 R28 R29 R30 R31 R32 R33 R34 R35 R36 R37 R38 R39 R40 R41 R42 R43 R44 R45 R46 R47 R48 R49 R50 R51 R52 R53 R54 R55 R56 R57 R58 R59 R60 R61 R62 R63 R64 R65 R66 R67 R68 R69 R70 R71 R72 R73 R74 R75 R76 R77 R78 R79 R80 R81 R82 R83 R84 R85 R86 R87 R88 R89 R90 R91 R92 R93 R94 R95: library part RES
  R1 R2 R3 R4 R5 R6 R7 R8 R9 R12 R13 R14 R15 R16 R17 R18 R19 R20 R21 R22 R23 R24 R25 R26 R27 R28 R29 R30 R31 R32 R33 R34 R35 R36 R37 R38 R39 R40 R41 R42 R43 R44 R46 R47 R48 R49 R50 R51 R52 R53 R54 R55 R56 R57 R58 R62 R63 R64 R65 R66 R67 R68 R69 R70 R71 R72 R73 R74 R75 R76 R77 R78 R79 R80 R81 R82 R83 R84 R85 R86 R87 R88 R89 R90 R91 R92 R93 R94 R95: Assembly=.
  R45 R59 R60 R61: Assembly=DNP
SW1 SW3: library part SPST-R/A, "SWITCH TACT 6.00x6.00 7.00mm 180gF THT R/A", Manufacturer="KLS ELECTRONIC", Assembly=., Help URL=https://www.ozdisan.com/p/tact-sivicler-485/kls-electronic-l-kls7-ts6606-7-0-180-459003, PN=TA3-4W2-V-T/R
SW2: library part SPDT, Assembly=., HelpURL=https://www.digikey.com/en/products/detail/w%C3%BCrth-elektronik/450302014072/5209105, PN=450302014072
U1: library part TPS5420xx
U2: library part LD1117, "Wide Temperature Three-Pin Adjustable Regulator", Assembly=., HelpURL=https://www.digikey.com/en/products/detail/stmicroelectronics/LD1117AS33TR/585752, PN=LD1117AS33TR
U3: library part RFM-0505S
U4 U22: "IC REG LINEAR 3.3V 600MA SOT-25", Assembly=., HelpURL=https://www.digikey.com/en/products/detail/diodes-incorporated/AP7366EA-33W5-7/18635685?s=N4IgTCBcDaIIIAUDsBmAbGgonAtClA6gKw5IgC6AvkA, PN=AP7366EA-33W5-7
U5: library part "TI ISO154x", "I2C Digital Isolator 2500Vrms 2 Channel 1Mbps 25kV/µs CMTI 8-SOIC (0.154\", 3.90mm Width)", Assembly=., HelpURL=https://www.digikey.com/en/products/detail/texas-instruments/ISO1541DR/3587223?s=N4IgTCBcDaIJIGUDyBGArAFhQEQEogF0BfIA, PN=ISO1541DR
U6 U7: "SPI Digital Isolator 3000Vrms 4 Channel 2Mbps 50kV/µs CMTI 16-SSOP (0.154\", 3.90mm Width)", Assembly=., HelpURL=https://www.digikey.com/en/products/detail/texas-instruments/ISO7041DBQR/10448338, PN=ISO7041DBQR
U8: "1/1 Transceiver CANbus 8-SOIC", Assembly=., HelpURL=https://www.digikey.com/en/products/detail/microchip-technology/MCP2562FD-E-SN/4842808, PN=MCP2562FD-E/SN
U9 U13: "CAN, RS232, RS485, SPI Digital Isolator 3000Vrms 2 Channel 50Mbps 100kV/µs CMTI 8-SOIC (0.154\", 3.90mm Width)", HelpURL=https://www.digikey.com/en/products/detail/texas-instruments/ISO6721FBDR/13627193?s=N4IgTCBcDaIJIGUDyA2A7GAjAMQEIBEAlEAXQF8g, PN=ISO6721FBDR
  U9: Assembly=.
U10: "1/1 Transceiver, Isolated Half RS422, RS485 8-SOIC", Assembly=., HelpURL=https://www.digikey.com/en/products/detail/analog-devices-inc-maxim-integrated/MAX22028FAWA/15652899, PN=MAX22028FAWA+
U11: "IC SWITCH SPDT X 2 15OHM 10VSSOP", Assembly=., HelpURL=https://www.digikey.com/en/products/detail/texas-instruments/TS5A23157QDGSRQ1/3996775, PN=TS5A23157QDGSRQ1
U12: "IC TRANSCEIVER FULL 1/1 16TSSOP", Assembly=., HelpURL=https://www.digikey.com/en/products/detail/texas-instruments/MAX3221EIPWR/964660?s=N4IgTCBcDaILIEEAaBmMYCMBRAkgBQHUAlEAXQF8g, PN=MAX3221EIPWR
U14: "ARM® Cortex®-M7 STM32H7 Microcontroller IC 32-Bit 550MHz 1MB (1M x 8) FLASH 144-LQFP (20x20)", Assembly=., HelpURL=https://www.digikey.com/en/products/detail/stmicroelectronics/STM32H723ZGT6/13171205, PN=STM32H723ZGT6
U15: "SDRAM Memory IC 256Mbit Parallel 143 MHz 5.4 ns 54-TSOP II", Assembly=., HelpURL=https://www.digikey.com/en/products/detail/issi-integrated-silicon-solution-inc/IS42S16160J-7TLI/5319798, PN=IS42S16160J-7TLI
U16: "FLASH - NOR Memory IC 16Mbit SPI - Quad I/O 133 MHz 8-SOIC", Assembly=., HelpURL=https://www.digikey.com/en/products/detail/winbond-electronics/W25Q16JVSSIQ/6193769, PN=W25Q16JVSSIQ
U17: "PSRAM (Pseudo SRAM) Memory IC 16Mbit SPI, QPI 104 MHz 7 ns 8-SOIC", Assembly=., HelpURL=https://www.digikey.com/en/products/detail/issi-integrated-silicon-solution-inc/IS66WVS2M8BLL-104NLI/16260610, PN=IS66WVS2M8BLL-104NLI
U18 U23 U25: library part OPTO, Assembly=., HelpURL=https://www.ozdisan.com/p/transistor-ve-fotovoltaik-cikisli-optokuplorler-189/liteon-ltv816s2tpc-v-g-951812, PN=LTV816S2TPC-V-G
U19: library part ADUM3165, "3.75 kV RMS Digital Isolators for Isolated USB 2.0 High, Full, and Low Speed", Assembly=., HelpURL=https://www.digikey.com/en/products/detail/analog-devices-inc/ADUM3165BRSZ-RL/16580710, PN=ADUM3165BRSZ-RL
U21: "SENSOR DIGITAL -55C-125C 8TSSOP", Assembly=., HelpURL=https://www.digikey.com/en/products/detail/nxp-usa-inc/LM75BDP-118/2075977, PN=LM75BDP,118
U24: "IC PWR SWITCH N-CHAN 1:1 SOT23-5", Manufacturer=STMicroelectronics, Assembly=., Help URL=https://www.ozdisan.com/p/power-switch-entegreleri-283/stm-stmps2141str-481741, PN=STMPS2141STR
Y1 Y2: library part Crystal(4-SMD), "25 MHz ±10ppm Crystal 10pF 50 Ohms 4-SMD, No Lead", Assembly=., HelpURL=https://www.digikey.com/en/products/detail/abracon-llc/ABM8-25-000MHZ-10-D1G-T/5980064?s=N4IgTCBcDaIIICECyAOAtGArAOgAz6QAkAtNARlzQBEyBxNAFRAF0BfIA, PN=ABM8-25.000MHZ-10-D1G-T
D2: Assembly=., HelpURL=https://www.digikey.com/en/products/detail/diodes-incorporated/B340AE-13/7352831, PN=B340AE-13
J3 J6 J7 J8: Assembly=., HelpURL=https://www.ozdisan.com/p/gecmeli-klemensler-411/degson-2edgrc-5-08-04p-14-00ah-445450, PN=2EDGRC-5.08-04P
J4 J5: Assembly=., HelpURL=https://www.ozdisan.com/p/gecmeli-klemensler-411/degson-2edgrc-5-08-04p-14-00ah-445450, PN=2EDGRC-5.08-04P-14-00AH
U20: Assembly=., HelpURL=https://www.digikey.com/en/products/detail/texas-instruments/TS3USB30ERSWR/2092506, PN=TS3USB30ERSWR

## Free pads (board coordinates)
  round 3.2 hole 3.2: 1(2.719,2.705) 1(2.719,82.281) 1(114.281,2.719) 1(114.281,82.295)

## Via types
v1: diameter 0.4, hole 0.2, Top Layer to Bottom Layer, tented both sides, 473 vias
v2: diameter 0.4, hole 0.2, Top Layer to Bottom Layer, 8 vias
v3: diameter 0.45, hole 0.3, Top Layer to Bottom Layer, tented both sides, 1 vias

## Nets (pads, with @x,y where several pads share a name; then routed paths per layer and width w, separated by ;. In a path a pad name is that pad's centre, name@x,y a point inside that pad or via, vN(x,y) a via of type N, cw(c..) or ccw(c..) an arc to the next point about the centre after c; other vN are vias at no path point)
+3.3V_ISO: C16.2 C100.2 J12.5 J13.5 J14.5 J15.5 J16.5 J17.5 TP13.1 U22.5 | length 3.8
  Top Layer w1: U22.5@102.323,74.787 C16.2@106.073,74.787
  other v1: 107.513,74.972 107.514,75.686 106.086,76.4 106.8,76.4 107.514,76.4
+3.3VDC: C10.2 C11.2 C23.2 C24.2 C26.1 C29.2 C31.1 C34.2 C37.1 C41.2 C43.1 C44.2 C45.1 C48.2 C51.1 C79.1 C80.2 C81.1 C82.2 C83.1 C84.1 C85.1 C86.1 C87.1 C88.1 C94.2 C97.2 C98.1 C99.2 CN1.4 D6.2 FB3.1 J9.4 J11.3 R12.2 R14.1 R43.1 R44.1 R47.1 R49.1 R50.1 R51.1 R55.1 R56.1 R59.1 R60.1 R61.1 R69.1 R70.1 R71.1 R72.1 R73.1 R74.1 R78.2 R79.2 SW3.1 TP3.1 U2.2 U2.4 U5.1 U6.1 U7.1 U9.1 U10.3 U11.8 U13.1 U15.1 U15.3 U15.9 U15.14 U15.27 U15.43 U15.49 U16.8 U17.8 U19.18 U19.20 U21.8 | length 116.8